# Altium PCB cricket-node-hw__B.PcbDoc (part 1 of 3)
Units mil, origin at the board's own origin, x right, y up, seen from the top; angles counter-clockwise.
Board outline 2830 x 2830 mil, 4 copper layers (Top Layer, GND1, PWR/SIG, Bottom Layer), stack 61.7 mil thick; 153 components, 116 nets, 542 pads, 320 vias.
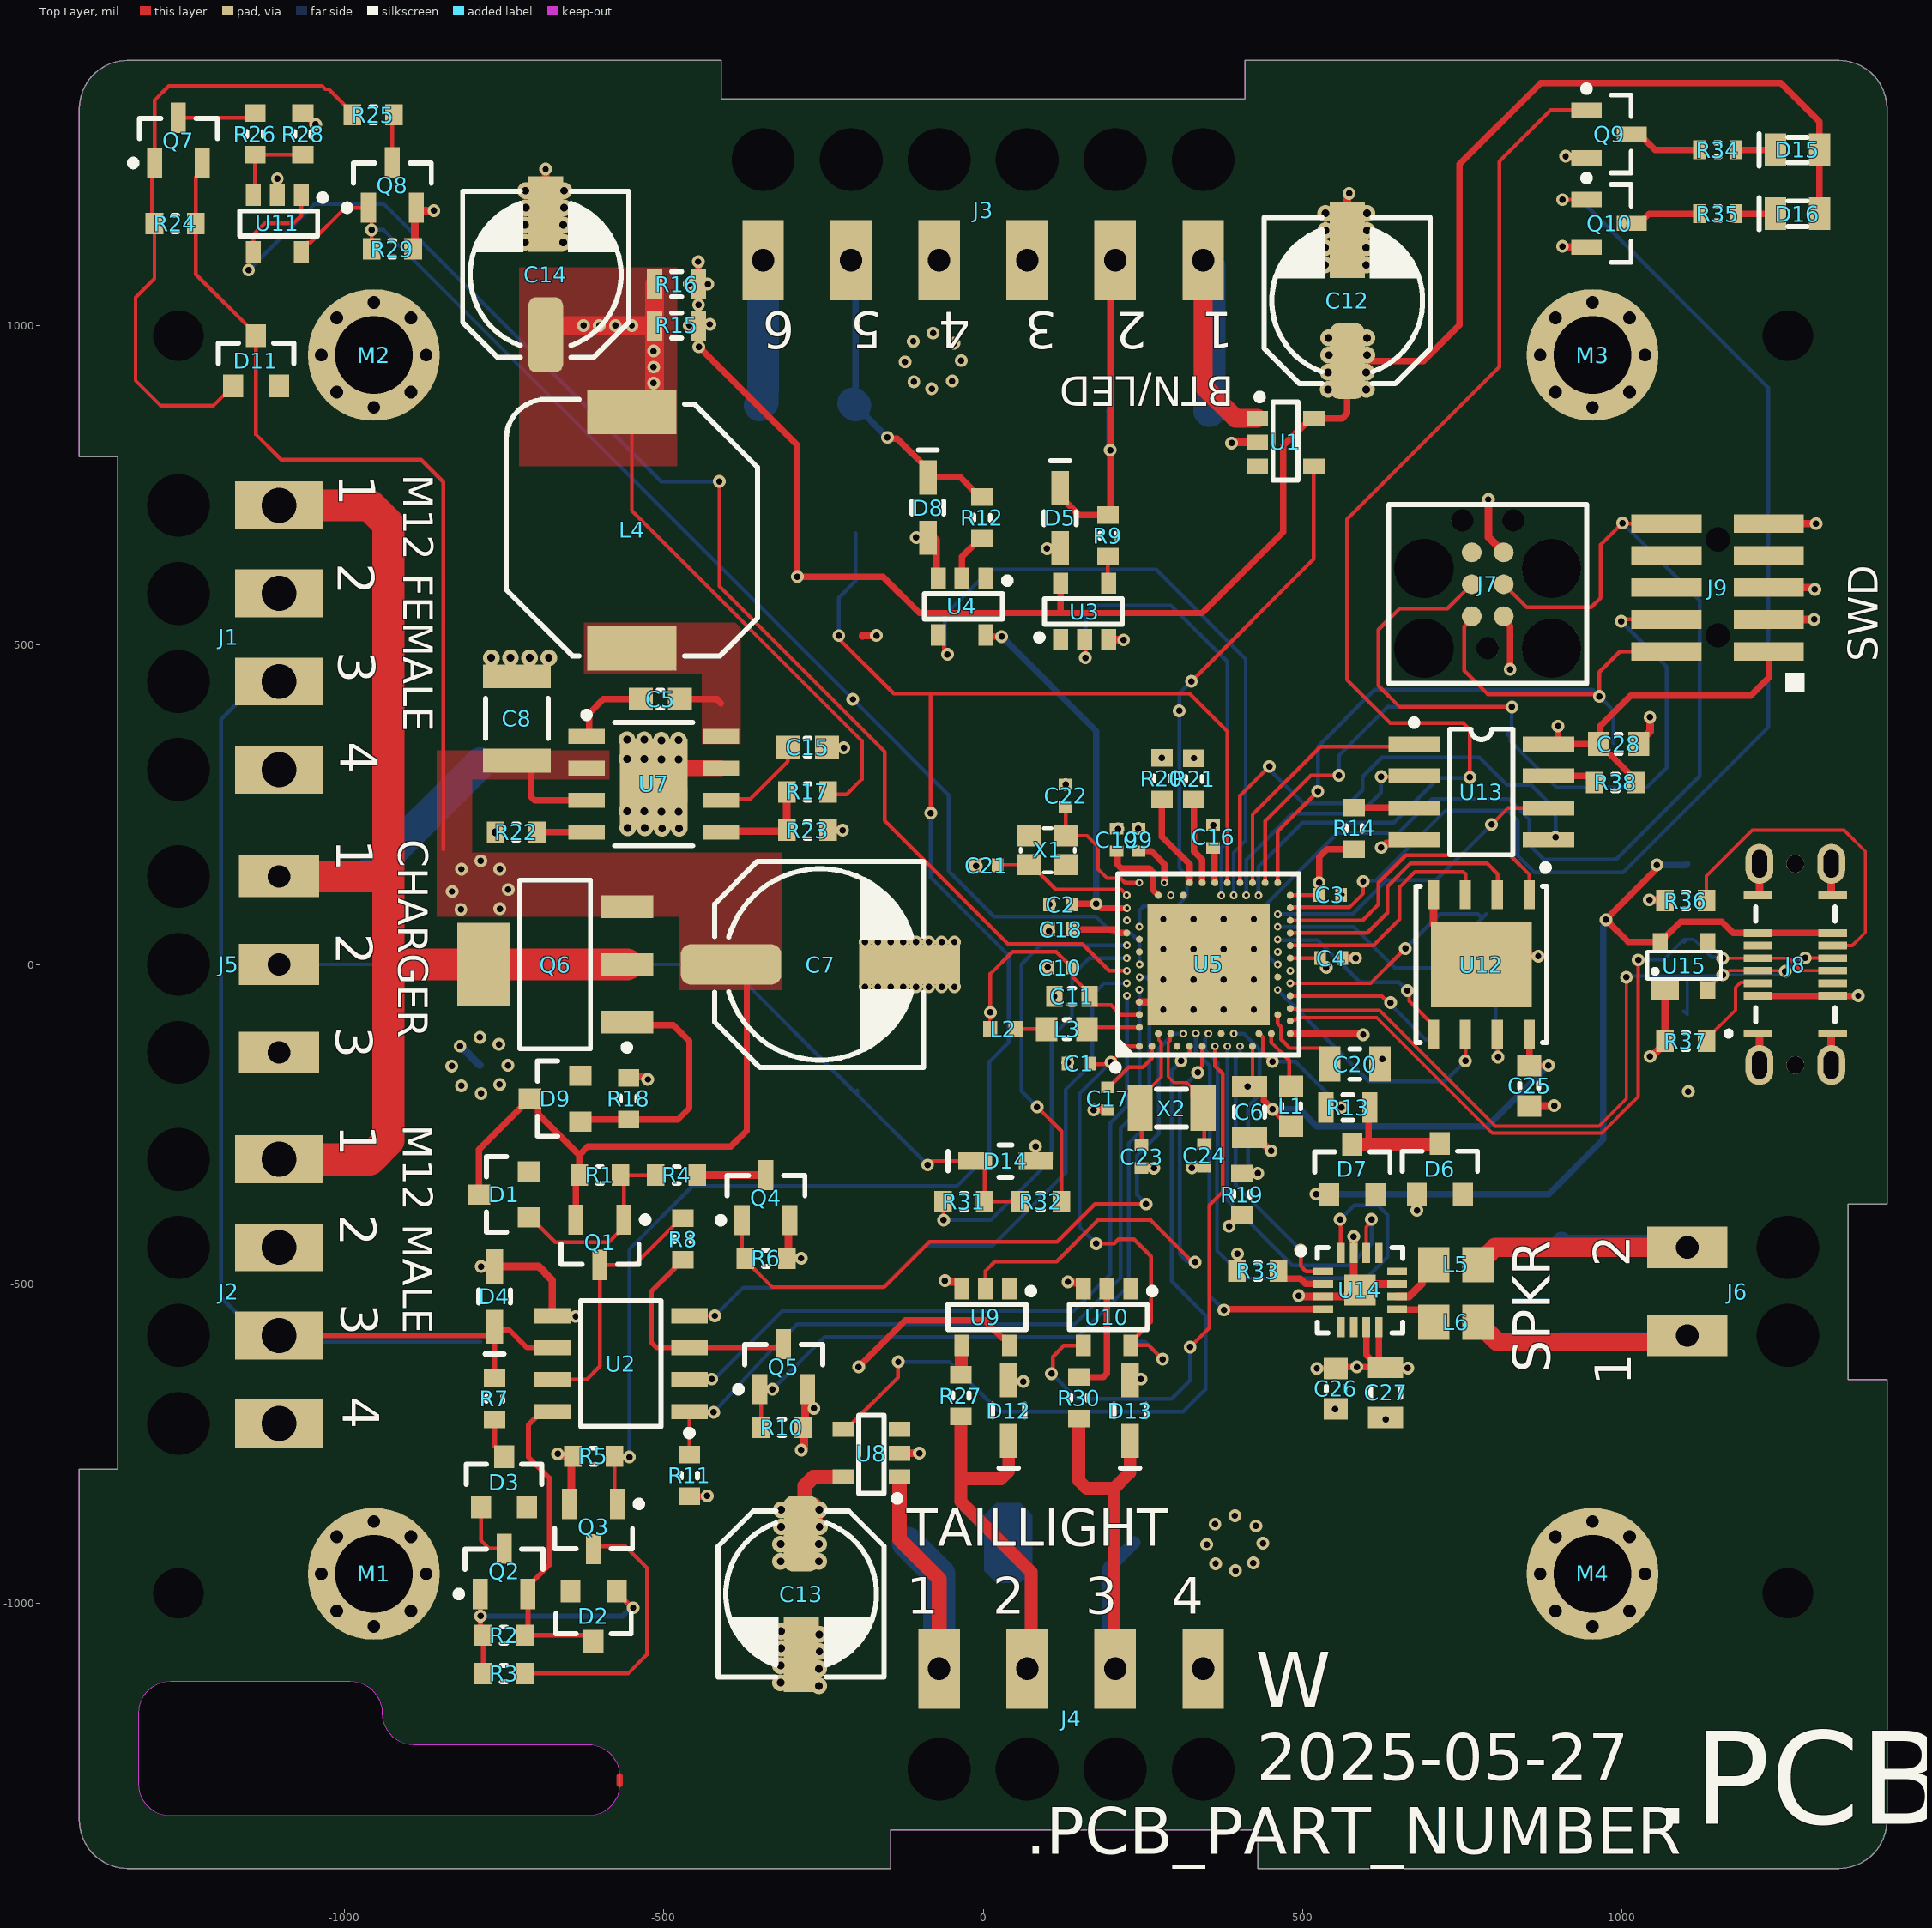
[diagram p0: Top Layer view]
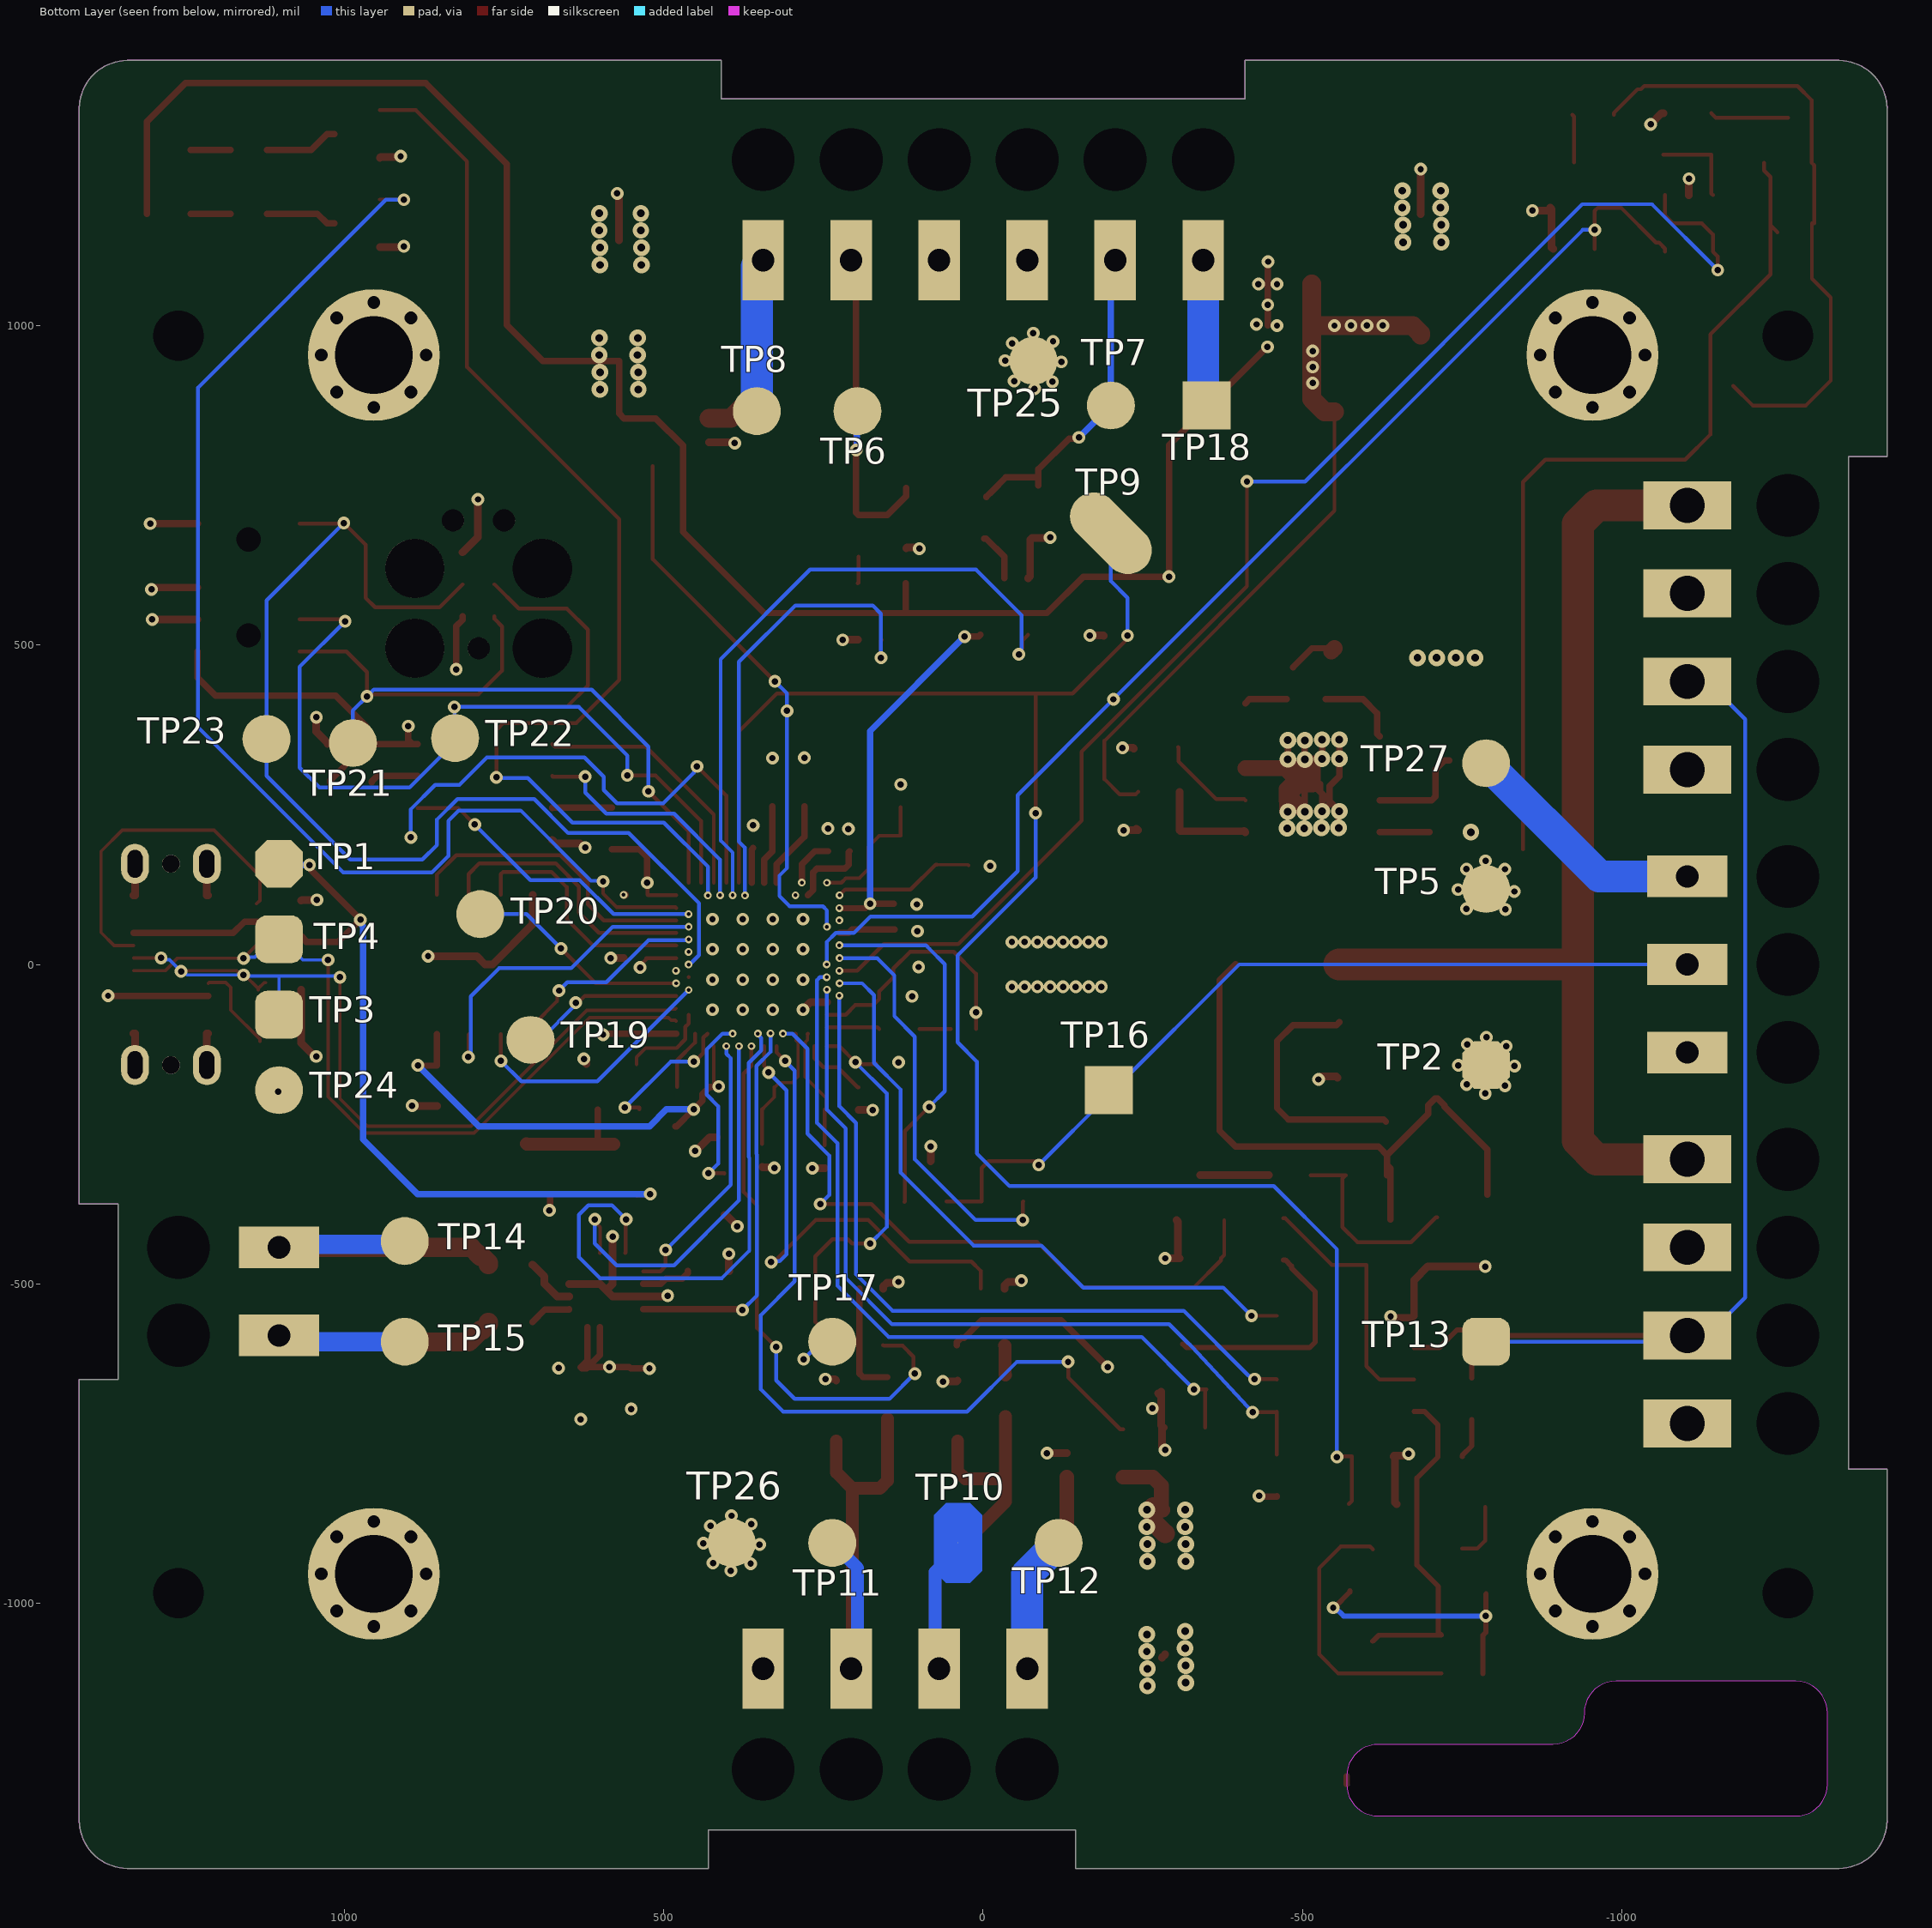
[diagram p1: Bottom Layer view, seen from below]
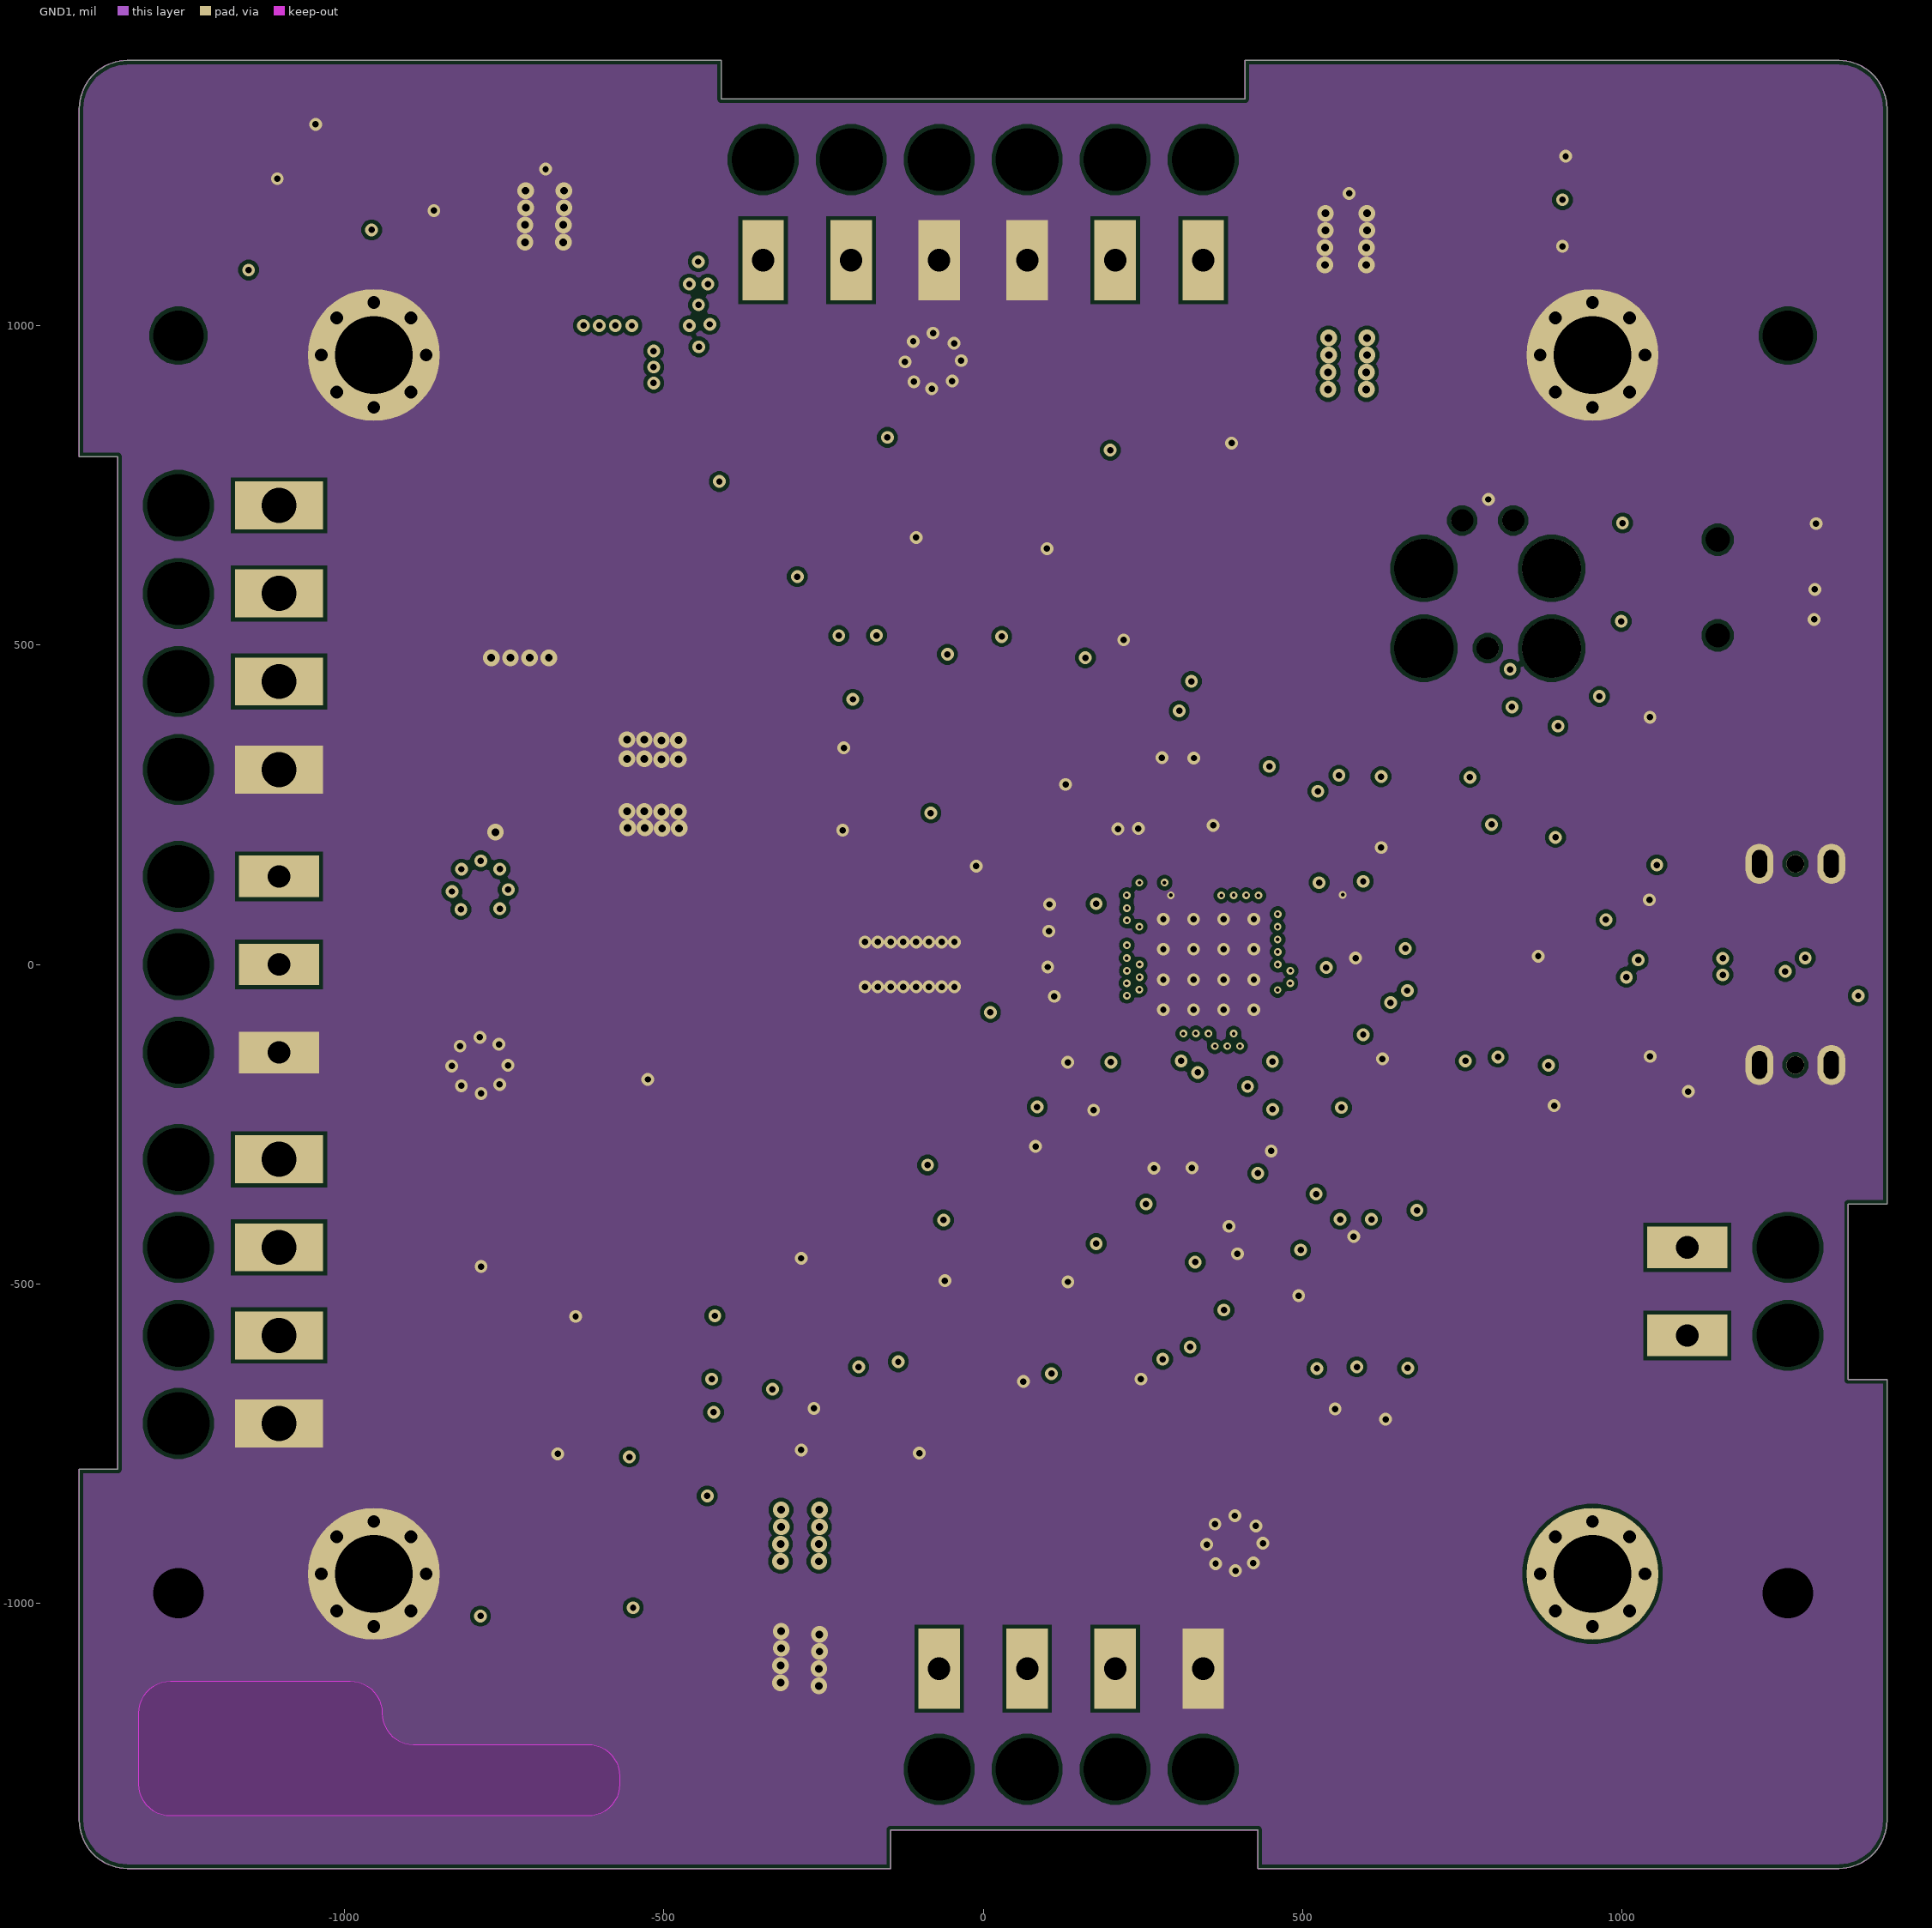
[diagram p2: GND1]
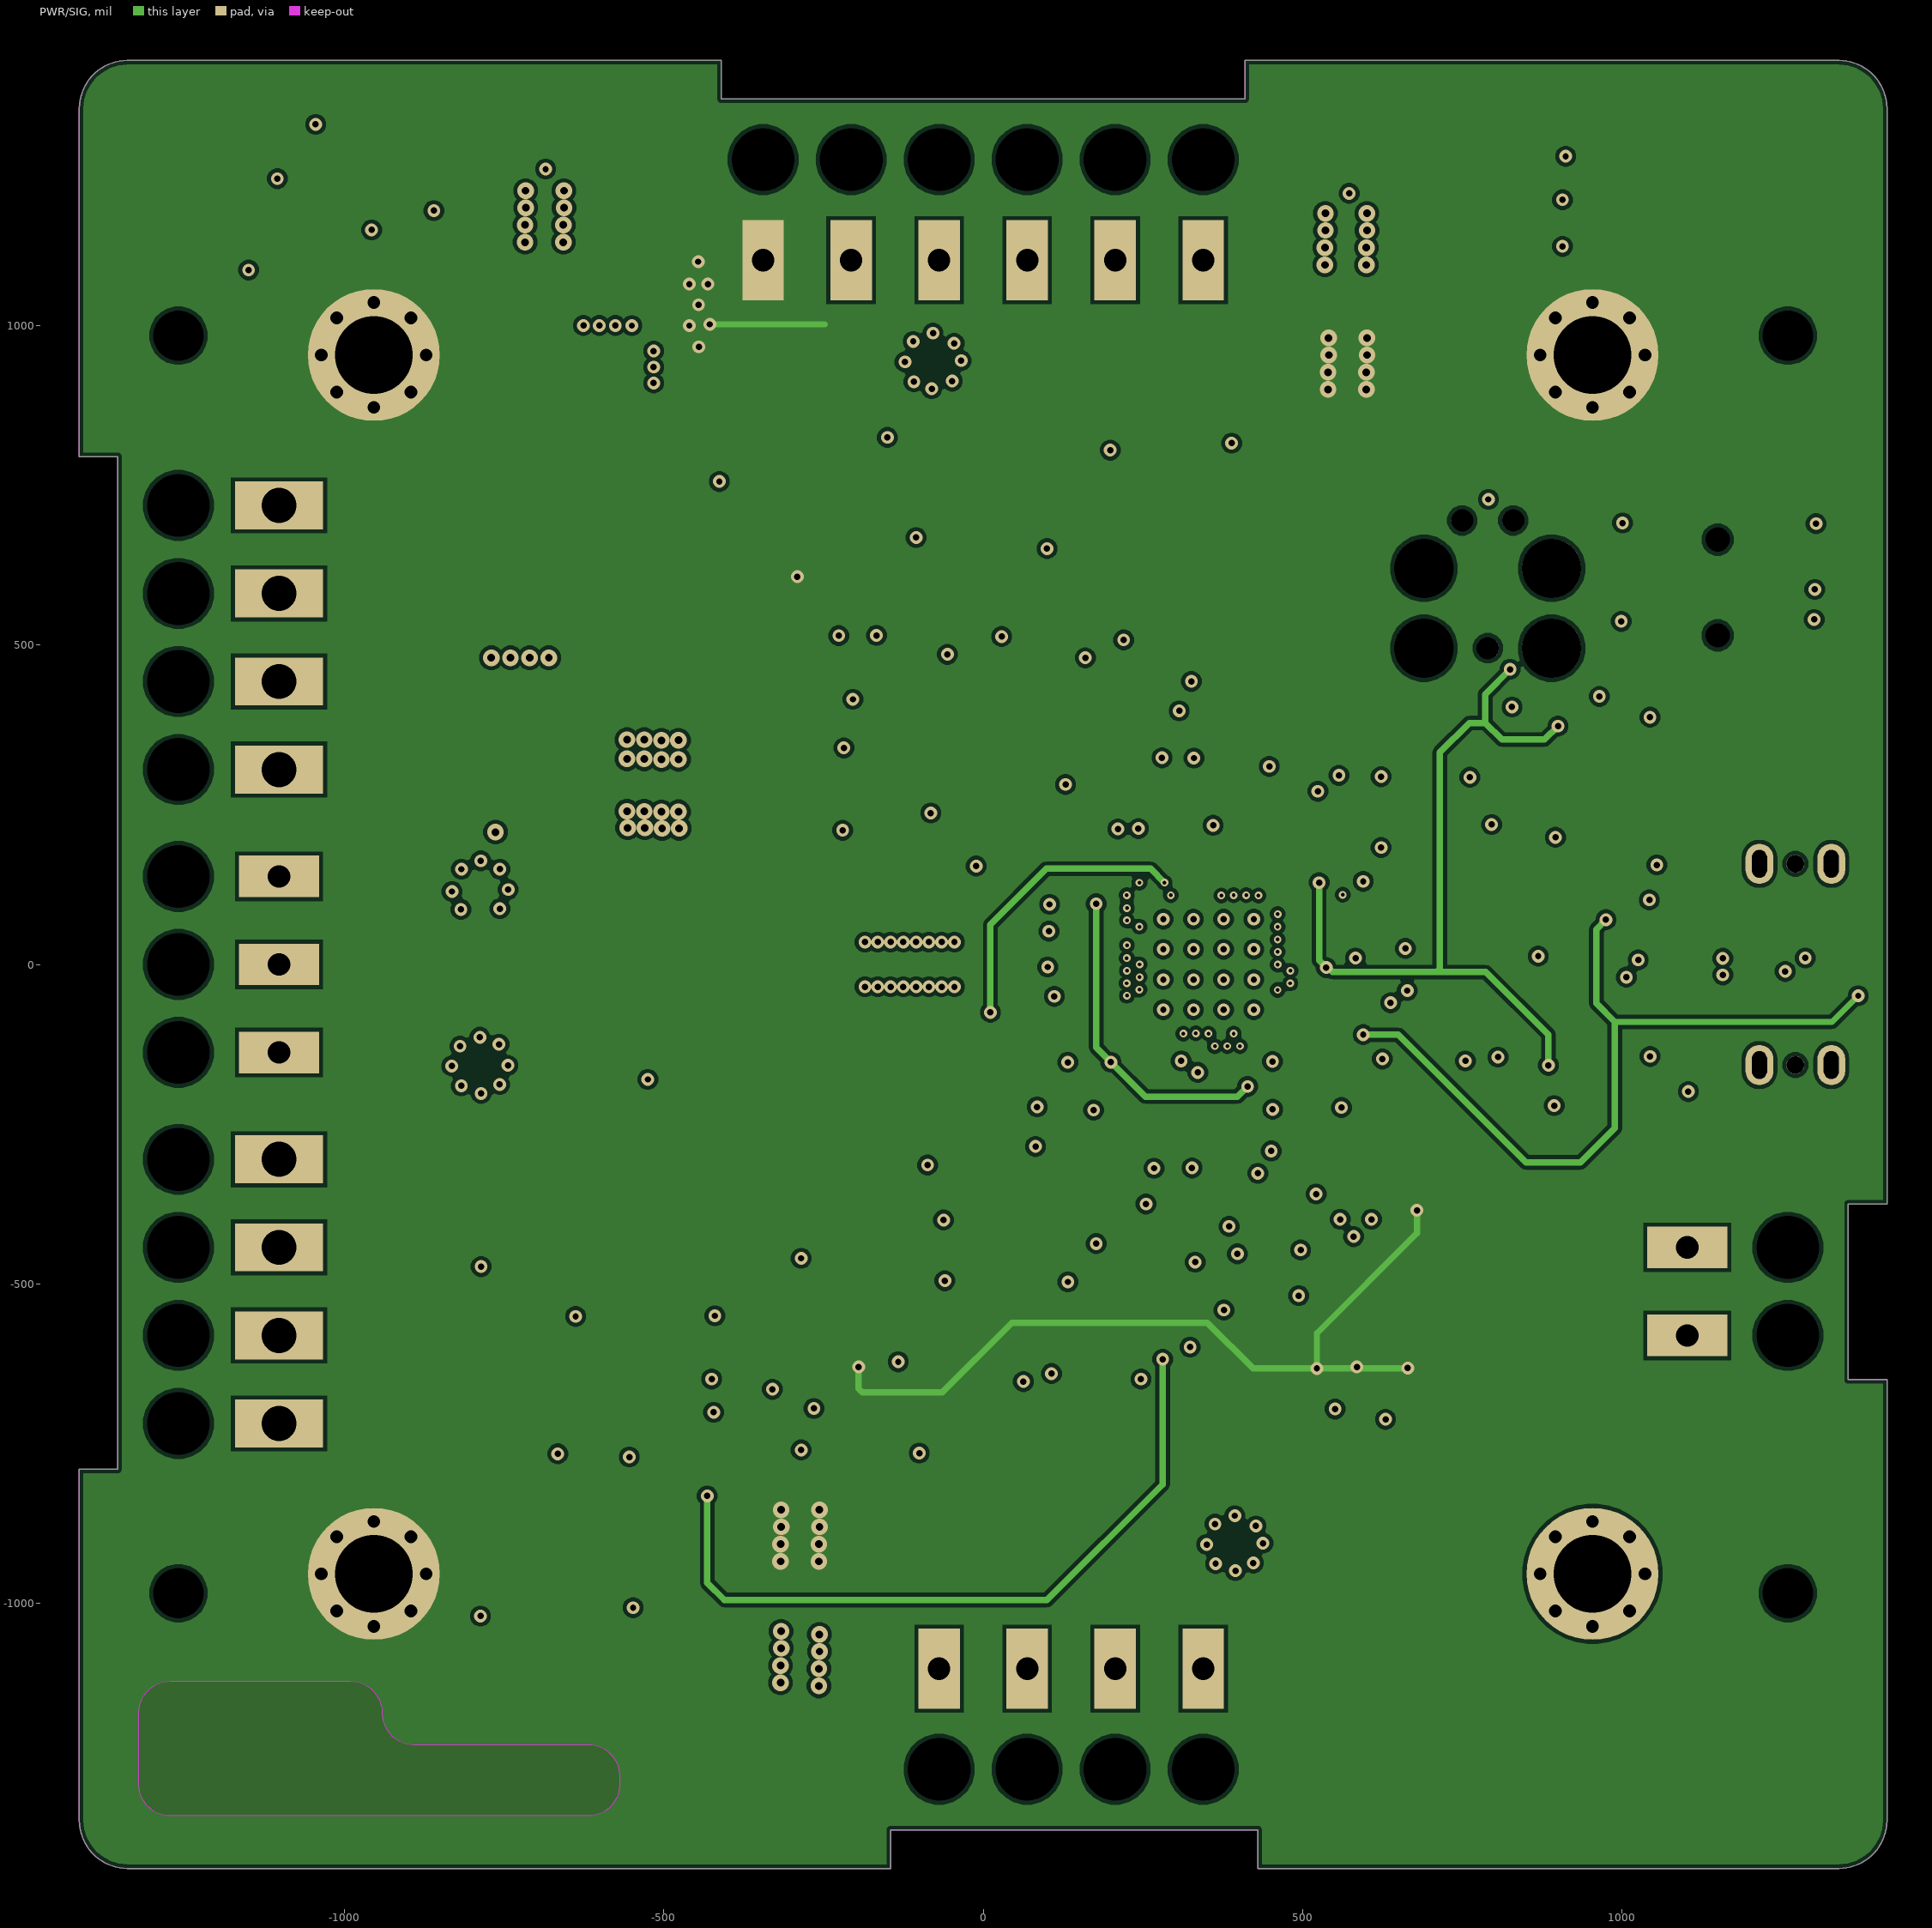
[diagram p3: PWR/SIG]
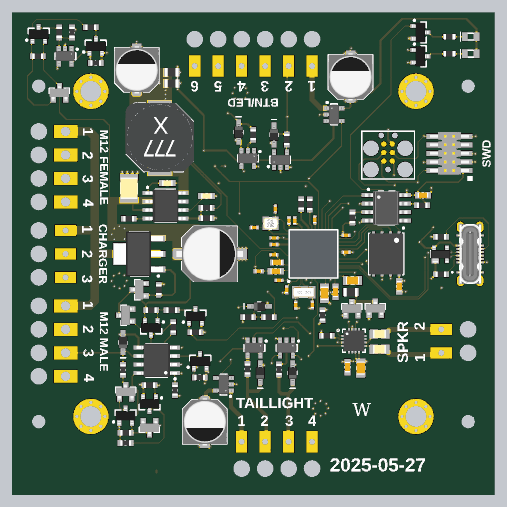
[diagram p5: 3D render of the assembled board from above, using the file's embedded part models]

## Layer stack, top to bottom
Top Solder: solder mask 0.4, Solder Resist, Dk 3.5
Top Layer: signal copper 1.4
Dielectric 1: prepreg 2.8, PP-006, Dk 4.1
GND1: signal copper 1.378
Dielectric1: dielectric 50.544, FR-4, Dk 4.8
PWR/SIG: signal copper 1.378
Dielectric 2: prepreg 2.8, PP-006, Dk 4.1
Bottom Layer: signal copper 1.4
Bottom Solder: solder mask 0.4, Solder Resist, Dk 3.5

## Board outline
-1415,-1340 ccw(c-1340,-1340) -1340,-1415 -145,-1415 -145,-1355 430,-1355 430,-1415 1340,-1415 ccw(c1340,-1340) 1415,-1340 1415,-650 1354.49,-650 1354.49,-374.97 1415,-374.97 1415,1340 ccw(c1340,1340) 1340,1415 410,1415 410,1355 -410,1355 -410,1415 -1340,1415 ccw(c-1340,1340) -1415,1340 -1415,795 -1355,795 -1355,-790 -1415,-790
cut-out: -1322,-1283 -1322,-1172 cw(c-1272,-1172) -1272,-1122 -991,-1122 cw(c-991,-1172) -941,-1172 ccw(c-892,-1172) -892,-1221 -619,-1221 cw(c-619,-1271) -569,-1271 -569,-1283 cw(c-619,-1283) -619,-1333 -1272,-1333 cw(c-1272,-1283)

## Design rules (kind name [scope] priority, off if disabled: settings)
Clearance [All] p1: gap=6 ignorepadtopadclearanceinfootprint=FALSE
ComponentClearance [All] p1: gap=0 collisioncheckmode=3 verticalgap=10 showdistances=FALSE
DiffPairsRouting USB [All] p1: maxlimit=6 minlimit=6 mostfreqgap=6 toplayer_minwidth=5.14 toplayer_maxwidth=5.14 toplayer_prefwidth=5.14 midlayer1_minwidth=5.14 midlayer1_maxwidth=5.14 midlayer1_prefwidth=5.14 midlayer2_minwidth=5.14 midlayer2_maxwidth=5.14 midlayer2_prefwidth=5.14 bottomlayer_minwidth=5.14 bottomlayer_maxwidth=5.14 bottomlayer_prefwidth=5.14 maxuncoupledlength=750
Height [All] p1: minheight=0 maxheight=3000 prefheight=500
HoleSize [All] p1: absolutevalues=TRUE maxlimit=250 minlimit=1 maxpercent=80.000 minpercent=20.000
PolygonConnect [All] p1: connectstyle=Direct reliefconductorwidth=10 reliefentries=4 polygonreliefangle="90 Angle" airgapwidth=10
RoutingVias [All] p1: holewidth=12 width=26 viastyle="Through Hole" minholewidth=6 minwidth=12 maxholewidth=50 maxwidth=75
SilkToSolderMaskClearance SilkscreenOverComponentPads [IsPad] p1: minsilkscreentomaskgap=10 clearancetoexposedcopper=TRUE
SolderMaskExpansion [All] p1: expansion=4 istentingtop=FALSE
SupplyNets "Schematic Supply Nets" [InNet('+VIN-PROTECT')] p1: voltage=0.000
SupplyNets "Schematic Supply Nets_1" [InNet('+5v0')] p2: voltage=0.000
SupplyNets "Schematic Supply Nets_2" [InNet('VDD')] p3: voltage=0.000
SupplyNets "Schematic Supply Nets_8" [InNet('+VIN')] p4: voltage=0.000
SupplyNets "Schematic Supply Nets_7" [InNet('GND')] p5: voltage=0.000
SupplyNets "Schematic Supply Nets_3" [InNet('+VBUS')] p6: voltage=0.000
Width [All] p1: maxlimit=200 minlimit=5 preferedwidth=6
25 further rules are at their usual default settings.

## Classes and differential pairs
differential pair USB-DEVICE-D: +USB-DEVICE-D_P -USB-DEVICE-D_N

## Components (designator, comment, footprint, x,y, rotation, side; value= is the part's Value field where it differs from the comment)
C1 "0.1µF" C0402_0.55MM_HD 150,-155 r0 top
C2 "0.1µF" C0402_0.55MM_HD 121,94 r0 top
C3 "0.1µF" C0402_0.55MM_HD 543,109 r180 top
C4 "0.1µF" C0402_0.55MM_HD 545,10 r180 top
C5 "0.1µF" C0603_0.90MM_MD#1 -505.53,415.13 r180 top
C6 "4.7µF" C0805_1.40MM_MD 417,-231 r90 top
C7 "100µF" C_ALU_F -255,0 r0 top locked
C8 "10µF" C1210_2.80MM_MD -730,385 r90 top
C9 "47nF" C0402_0.55MM_HD 243,195 r270 top value=0.047µF
C10 "47nF" C0402_0.55MM_HD 120,-5 r0 top value=0.047µF
C11 "1µF" C0603_0.90MM_HD 139,-50 r0 top
C12 "150µF" C_ALU_D 570,1039 r90 top
C13 "150µF" C_ALU_D -285,-985.51 r270 top
C14 "150µF" C_ALU_D -685,1080 r90 top
C15 "10000pF" C0603_0.90MM_MD#1 -275,340 r180 top
C16 "1000pF" C0402_0.55MM_HD 360,200 r270 top
C17 "0.1µF" C0402_0.55MM_HD 195,-210 r90 top
C18 "0.1µF" C0402_0.55MM_HD 121,55 r0 top
C19 "100pF" C0402_0.55MM_HD 209,195 r270 top
C20 "4.7µF" C0805_1.40MM_MD 582,-156 r180 top
C21 "8pF" C0402_0.55MM_HD 5,155 r180 top
C22 "8pF" C0402_0.55MM_HD 129,264 r90 top
C23 "8pF" C0402_0.55MM_HD 248,-301 r90 top
C24 "8pF" C0402_0.55MM_HD 346,-299 r90 top
C25 "0.1µF" C0603_0.90MM_MD#2 855,-190 r90 top
C26 "0.1µF" C0603_0.90MM_MD#2 552,-664 r90 top
C27 "10µF" C0805_1.40MM_MD 630,-670 r90 top
C28 "0.1µF" C0603_0.90MM_MD#2 995,345 r180 top
D1 "BZX84C12-7-F" D_SOT-23-3_P -750,-360 r180 top
D2 "BZX84B16-7-F" D_SOT-23-3_P -610,-1020 r270 top
D3 "BAS16-7-F" D_SOT-23-3_P -750,-810 r90 top
D4 "PESD1IVN24-AX" D_SOD-323_P -765,-520 r270 top
D5 "PESD5V0S1BA-115" D_SOD-323_P 120.53,698.65 r90 top
D6 "BAS16-7-F" D_SOT-23-3_P 715,-320 r90 top
D7 "BAS16-7-F" D_SOT-23-3_P 578,-321 r90 top
D8 "PESD5V0S1BA-115" D_SOD-323_P -86.57,715.03 r90 top
D9 "BZX84B16-7-F" D_SOT-23-3_P -670,-210 r180 top
D11 "BZX84B16-7-F" D_SOT-23-3_P -1138.39,944.88 r90 top
D12 "PESD5V0S1BA-115" D_SOD-323_P 40,-698.5 r270 top
D13 "PESD5V0S1BA-115" D_SOD-323_P 230,-698.5 r270 top
D14 "PESD5V0S1BA-115" D_SOD-323_P 35,-308 r180 top
D15 "APT2012SURCK" LED-0805-RED 1275,1275 r180 top
D16 "APT2012CGCK" LED-0805-GREEN 1275,1175 r180 top
J1 "WIREPAD-18AWG-4X-3.5MM" WIREPAD-18AWG-4X-3.5MM -1181.1,511.81 r0 top
J2 "WIREPAD-18AWG-4X-3.5MM" WIREPAD-18AWG-4X-3.5MM -1181.1,-511.81 r0 top
J3 "WIREPAD-22AWG-6X-3.5MM" WIREPAD-22AWG-6X-3.5MM 0,1181.1 r270 top
J4 "WIREPAD-22AWG-4X-3.5MM" WIREPAD-22AWG-4X-3.5MM 137.8,-1181.1 r90 top
J5 "WIREPAD-22AWG-3X-3.5MM" WIREPAD-22AWG-3X-3.5MM -1181.1,0 r0 top
J6 "WIREPAD-22AWG-2X-3.5MM" WIREPAD-22AWG-2X-3.5MM 1181.1,-511.81 r180 top
J7 "TAG-CONNECT-SWD" TC2030 950,435 r90 top
J8 "USB4145-03-0230-C" USB4145-03-0230-C 1271.65,0 r90 top locked
J9 "20021121-00010T4LF" FTSH-105-05-F-DV 1150,590 r90 top
L1 "10uH" C0603_0.90MM_MD#2 482,-222 r90 top
L2 "15nH" C0402_0.55MM_MD 31.02,-101.18 r0 top
L3 "10uH" C0603_0.90MM_MD#2 131.02,-101.18 r0 top
L4 "6.8 uH 3.84A" L_MSS1038 -550,680 r90 top
L5 "MPZ2012S221AT000" L0805_1.45MM_MD 740,-470 r0 top
L6 "MPZ2012S221AT000" L0805_1.45MM_MD 740,-560 r0 top
M1 "M2.5" M2.5 -954,-954 r0 top locked
M2 "M2.5" M2.5 -954,954 r0 top locked
M3 "M2.5" M2.5 954,954 r0 top locked
M4 "M2.5" M2.5 954,-954 r0 top locked
Q1 "BSS84-7-F" SOT-23 -600,-435 r270 top
Q2 "BSS84-7-F" SOT-23 -750,-950 r90 top
Q3 "2N7002P,215" SOT-23 -610,-880 r270 top
Q4 "2N7002P,215" SOT-23 -340,-365 r90 top
Q5 "BSS138K" SOT-23 -312.4,-629.57 r90 top
Q6 "ZXMP4A16GTA" SOT223 -670,0 r180 top
Q7 "BSS84-7-F" SOT-23 -1260,1290 r90 top
Q8 "2N7002P,215" SOT-23 -925,1220 r90 top
Q9 "2N7002P,215" SOT-23 980,1300 r0 top
Q10 "2N7002P,215" SOT-23 980,1160 r0 top
R1 "100kΩ" R0603_0.55MM_MD -600,-330 r180 top
R2 "100kΩ" R0603_0.55MM_MD -750,-1050 r0 top
R3 "10kΩ" R0603_0.55MM_MD -750,-1110 r0 top
R4 "10kΩ" R0603_0.55MM_MD -480,-330 r0 top
R5 "1MΩ" R0603_0.55MM_MD -610,-770 r0 top
R6 "1MΩ" R0603_0.55MM_MD -340,-460 r180 top
R7 "1kΩ" R0603_0.55MM_MD -765,-680 r90 top
R8 "100kΩ" R0603_0.55MM_MD -470,-430 r270 top
R9 "100Ω" R0603_0.55MM_MD 195.33,671.09 r90 top
R10 "1MΩ" R0603_0.55MM_MD -315,-725 r180 top
R11 "10kΩ" R0603_0.55MM_MD -460,-800 r90 top
R12 "100Ω" R0603_0.55MM_MD -1.77,699.28 r90 top
R13 "0Ω" R0805_0.70MM_HD 571,-224 r0 top
R14 "100kΩ" R0603_0.55MM_MD 581,213 r270 top
R15 "0Ω" R0805_0.70MM_HD -480,1000 r0 top
R16 "0Ω" R0805_0.70MM_HD -480,1065 r0 top
R17 "523kΩ" R0603_0.55MM_MD -275,270 r0 top
R18 "10kΩ" R0603_0.55MM_MD -555,-210 r90 top
R19 "100kΩ" R0603_0.55MM_MD 405,-360 r90 top
R20 "100kΩ" R0603_0.55MM_MD 280,291 r270 top
R21 "100kΩ" R0603_0.55MM_MD 330,290.48 r270 top
R22 "49.9kΩ" R0603_0.55MM_MD -731.04,207.13 r180 top
R23 "100k" R0603_0.55MM_MD -275,210 r0 top value=100kΩ
R24 "100kΩ" R0603_0.55MM_MD -1265,1160 r0 top
R25 "10kΩ" R0603_0.55MM_MD -955,1330 r0 top
R26 "100kΩ" R0603_0.55MM_MD -1140,1300 r90 top
R27 "100Ω" R0603_0.55MM_MD -35,-675 r270 top
R28 "10kΩ" R0603_0.55MM_MD -1065,1300 r90 top
R29 "1MΩ" R0603_0.55MM_MD -925,1120 r180 top
R30 "100Ω" R0603_0.55MM_MD 150,-678.5 r270 top
R31 "100kΩ" R0603_0.55MM_MD -30,-371 r180 top
R32 "100Ω" R0603_0.55MM_MD 90,-371 r180 top
R33 "100kΩ" R0603_0.55MM_MD 430,-480 r180 top
R34 "330Ω" R0603_0.55MM_HD 1150,1275 r0 top
R35 "330Ω" R0603_0.55MM_HD 1150,1175 r0 top
R36 "5.1kΩ" R0603_0.55MM_MD 1100,100 r0 top
R37 "5.1kΩ" R0603_0.55MM_MD 1100,-120 r0 top
R38 "100kΩ" R0603_0.55MM_MD 990,285 r0 top
TP1 "SMT Testpoint 1MM" SMT_TP-1MM-OCTAGON 1102.36,157.48 r180 bottom
TP2 "SMT Testpoint 1MM" SMT_TP-1MM-OCTAGON -787.4,-157.48 r180 bottom
TP3 "SMT Testpoint 1MM" SMT_TP-1MM-ROUNDED-RECT 1102.36,-78.74 r180 bottom
TP4 "SMT Testpoint 1MM" SMT_TP-1MM-ROUNDED-RECT 1102.36,39.37 r180 bottom
TP5 "SMT Testpoint 1MM" SMT_TP-1MM -787.4,118.11 r180 bottom
TP6 "SMT Testpoint 1MM" SMT_TP-1MM 196.85,866.14 r180 bottom
TP7 "SMT Testpoint 1MM" SMT_TP-1MM -200,875 r180 bottom
TP8 "SMT Testpoint 1MM" SMT_TP-1MM 354.33,866.14 r180 bottom
TP9 "SMT Testpoint 1MM" SMT_TP_OBROUND -200,675 r180 bottom
TP10 "SMT Testpoint 1MM" SMT_TP-CHAMFERED-RECT 39.37,-905.51 r180 bottom
TP11 "SMT Testpoint 1MM" SMT_TP-1MM 236.22,-905.51 r180 bottom
TP12 "SMT Testpoint 1MM" SMT_TP-1MM -118.11,-905.51 r180 bottom
TP13 "SMT Testpoint 1MM" SMT_TP-1MM-ROUNDED-RECT -787.4,-590.55 r180 bottom
TP14 "SMT Testpoint 1MM" SMT_TP-1MM 905.51,-433.07 r180 bottom
TP15 "SMT Testpoint 1MM" SMT_TP-1MM 905.51,-590.55 r180 bottom
TP16 "SMT Testpoint 1MM" SMT_TP-1MM-RECT -196.85,-196.85 r180 bottom
TP17 "SMT Testpoint 1MM" SMT_TP-1MM 236.22,-590.55 r180 bottom
TP18 "SMT Testpoint 1MM" SMT_TP-1MM-RECT -350,875 r180 bottom
TP19 "SMT Testpoint 1MM" SMT_TP-1MM 708.66,-118.11 r180 bottom
TP20 "SMT Testpoint 1MM" SMT_TP-1MM 787.4,78.74 r180 bottom
TP21 "SMT Testpoint 1MM" SMT_TP-1MM 986.75,346.5 r180 bottom
TP22 "SMT Testpoint 1MM" SMT_TP-1MM 826.77,354.33 r180 bottom
TP23 "SMT Testpoint 1MM" SMT_TP-1MM 1122,353 r180 bottom
TP24 "SMT Testpoint 1MM" SMT_TP-1MM 1102.36,-196.85 r180 bottom
TP25 "SMT Testpoint 1MM" SMT_TP-1MM -78.74,944.88 r180 bottom
TP26 "SMT Testpoint 1MM" SMT_TP-1MM 393.7,-905.51 r180 bottom
TP27 "SMT Testpoint 1MM" SMT_TP-1MM -787.4,314.96 r180 bottom
U1 "AP22804AW5-7" SOT23-5 473.29,817.4 r0 top
U2 "TJA1021T/20/CM,118" SOIC127P600X175-8N -567.28,-625 r180 top
U3 "SN74LV1T34DBVR" SOT23-5 158.87,552.43 r90 top
U4 "SN74LV1T34DBVR" SOT23-5 -33.01,560.31 r270 top
U5 "NRF52840-QIAA-R" AQFN50P700X700X85_HS-74N 352.83,0 r90 top locked
U7 "AP64352SP-13" SO8-EP -515.72,282.13 r0 top locked
U8 "AP22804AW5-7" SOT23-5 -175,-765 r180 top
U9 "SN74LV1T34DBVR" SOT23-5 3.94,-551.81 r270 top
U10 "SN74LV1T34DBVR" SOT23-5 193.94,-551.81 r270 top
U11 "TLV271CW5-7" sot23-5 -1105,1160 r270 top
U12 "MX25R6435FZNIL0" SON127P600X80_HS-9N 780,0 r270 top
U13 "FM25L16B-GTR" "SOIC 8" 780,270 r270 top
U14 "MAX98357AETE+T" QFN50P300X300X80_HS-17N-2 590,-510 r0 top
U15 "PRTR5V0U2X,215" SOT143B 1067.87,-39.8 r0 top
X1 "32MHz" XTAL_2016 101.02,178.82 r180 top
X2 "32KHz" XTAL_3215 295,-225 r180 top

## Footprints (in the part's own frame and the unit in brackets; to place one, negate y for a bottom-side part, rotate by r counter-clockwise, add the part's x,y. Pads: shape width x height; smd on the part's side, far side on the other; paste and mask are expansions set on the pad)
AQFN50P700X700X85_HS-74N [mm] "AQFN, 73-Leads, Body 7.00x7.00mm, Pitch 0.50mm, Thermal Pad 4.95x4.95mm, IPC Medium Density"
  rect 4.85x4.85 smd mask+0.05: 74(0,0)
  round 0.275 smd paste+0.012 mask+0.05: A8(-1.25,3.25) A10(-0.75,3.25) A12(-0.25,3.25) A14(0.25,3.25) A16(0.75,3.25) A18(1.25,3.25) A20(1.75,3.25) A22(2.25,3.25) A23(2.75,3.25) AA24(3.25,-2.25) AB2(-2.75,-2.5) AC5(-2,-2.75) AC9(-1,-2.75) AC11(-0.5,-2.75) AC13(0,-2.75) AC15(0.5,-2.75) AC17(1,-2.75) AC19(1.5,-2.75) AC21(2,-2.75) AC24(3.25,-2.75) AD2(-2.75,-3.25) AD4(-2.25,-3.25) AD6(-1.75,-3.25) AD8(-1.25,-3.25) AD10(-0.75,-3.25) AD12(-0.25,-3.25) AD14(0.25,-3.25) AD16(0.75,-3.25) AD18(1.25,-3.25) AD20(1.75,-3.25) AD22(2.25,-3.25) AD23(2.75,-3.25) B1(-3.25,2.75) B3(-2.5,2.75) B5(-2,2.75) B7(-1.5,2.75) B9(-1,2.75) B11(-0.5,2.75) B13(0,2.75) B15(0.5,2.75) B17(1,2.75) B19(1.5,2.75) B24(3.25,2.75) C1(-3.25,2.25) D2(-2.75,2) D23(2.75,2) E24(3.25,1.75) F2(-2.75,1.5) F23(2.75,1.5) G1(-3.25,1.25) H2(-2.75,1) H23(2.75,1) J1(-3.25,0.75) J24(3.25,0.75) K2(-2.75,0.5) L1(-3.25,0.25) L24(3.25,0.25) M2(-2.75,0) N1(-3.25,-0.25) N24(3.25,-0.25) P2(-2.75,-0.5) P23(2.75,-0.5) R1(-3.25,-0.75) R24(3.25,-0.75) T2(-2.75,-1) T23(2.75,-1) U1(-3.25,-1.25) U24(3.25,-1.25) V23(2.75,-1.5) W1(-3.25,-1.75) W24(3.25,-1.75) Y2(-2.75,-2) Y23(2.75,-2)
  silkscreen extent -4.22,-3.6 3.6,3.82, body extent -3.5,-3.5 3.5,3.5, height 0.87
C0402_0.55MM_HD [mm] "Chip Capacitor, 2-Leads, Body 1.00x0.50mm, IPC High Density"
  rect 0.46x0.54 smd: 1(-0.45,0) 2(0.45,0)
  body extent -0.5,-0.25 0.5,0.25, height 0.55
C0402_0.55MM_MD [mm] "Chip Capacitor, 2-Leads, Body 1.00x0.50mm, IPC Medium Density"
  rect 0.56x0.64 smd: 1(-0.5,0) 2(0.5,0)
  body extent -0.5,-0.25 0.5,0.25, height 0.55
C0603_0.90MM_HD [mm] "Chip Capacitor, 2-Leads, Body 1.60x0.80mm, IPC High Density"
  rect 0.65x0.85 smd: 1(-0.7,0) 2(0.7,0)
  silkscreen extent -0.1,-0.33 0.1,0.33, body extent -0.8,-0.4 0.8,0.4, height 0.9
C0603_0.90MM_MD#1 [mm] "Capacitor 0603 - Medium Density"
  rect 0.95x0.9 smd: 1(-0.775,0) 2(0.775,0)
  silkscreen extent -0.1,-0.35 0.1,0.35, body extent -0.8,-0.4 0.8,0.4, height 0.9
C0603_0.90MM_MD#2 [mm] "Chip Capacitor, 2-Leads, Body 1.60x0.80mm, IPC Medium Density"
  rect 0.85x0.95 smd: 1(-0.8,0) 2(0.8,0)
  silkscreen extent -0.1,-0.38 0.1,0.38, body extent -0.8,-0.4 0.8,0.4, height 0.9
C0805_1.40MM_MD [mm] "Chip Capacitor, 2-Leads, Body 2.00x1.25mm, IPC Medium Density"
  rect 0.85x1.4 smd: 1(-1,0) 2(1,0)
  silkscreen extent -0.2,-0.6 0.2,0.6, body extent -1,-0.63 1,0.63, height 1.4
C1210_2.80MM_MD [mm] "Capacitor - 1210 - Medium Density"
  rect 0.95x2.7 smd: 1(-1.675,0) 2(1.675,0)
  silkscreen extent -0.8,-1.25 0.8,1.25, body extent -1.6,-1.25 1.6,1.25, height 2.8
C_ALU_D [mm] "6.3mm x 5.8mm"
  rrect50% 3x1.4 smd: 1(-2.4,0)
  rect 3x1.4 smd: 2(2.4,0)
  silkscreen extent -3.3,-3.3 3.3,3.3, body extent -3.5,-3.3 3.5,3.3, height 5.41
C_ALU_F [mm] "8.0mm x 10.2mm"
  rrect50% 4x1.6 smd: 1(-3.55,0)
  rect 4x1.6 smd: 2(3.55,0)
  silkscreen extent -4.2,-4.1 4.1,4.1, body extent -5,-4.15 4.9,4.15, height 10.22
D_SOD-323_P [mm] "SOD-123 Diode - Polarized"
  rect 1.35x0.7 smd: 1(-1.2,0) 2(1.2,0)
  silkscreen extent -0.25,-0.64 2.29,0.64, body extent -1.3,-0.68 1.3,0.67, height 1.1
D_SOT-23-3_P [mm] "Diode - SOT-23-3 - Polarized"
  rect 0.9x0.8 smd: 1(-1,0.915) 2(-1,-0.915) 3(1,0)
  silkscreen extent -0.1,-1.5 0.7,1.5, body extent -1.2,-1.45 1.22,1.45, height 0.98
FTSH-105-05-F-DV [mil]
  rect 29x110 smd: 1(-100,-80) 2(-100,80) 3(-50,-80) 4(-50,80) 5(0,-80) 6(0,80) 7(50,-80) 8(50,80) 9(100,-80) 10(100,80)
  rect 0x0 hole 38 unplated: M(-75,0) M(75,0)
  silkscreen extent -163,-136 -133,-106, body extent -125,-115 125,115, height 285
L0805_1.45MM_MD [mm] "Inductor - 0805 - Medium Density"
  rect 1.25x1.4 smd: 1(-0.875,0) 2(0.875,0)
  body extent -1,-0.62 1,0.63, height 1.45
L_MSS1038 [mm] "Coilcraft MSS1038 SMT Inductor"
  rect 1.78x3.56 smd: 1(-4.7,0) 2(4.7,0)
  silkscreen extent -5,-5 5.2,5, body extent -5.04,-5.1 5.26,5.1, height 3.91
LED-0805-GREEN [mm] "LED_0805"
  rect 0.85x1.3 smd: A(-0.875,0) C(0.875,0)
  silkscreen extent -0.38,-0.63 1.52,0.64, body extent -1,-0.62 1,0.62, height 0.75
LED-0805-RED [mm] "LED_0805"
  rect 0.85x1.3 smd: A(-0.875,0) C(0.875,0)
  silkscreen extent -0.38,-0.63 1.52,0.64, body extent -1,-0.62 1,0.62, height 0.75
M2.5 [mm]
  round 0 hole 0.5: 1(-2.087,0) 1(-1.476,-1.476) 1(-1.476,1.476) 1(0,-2.087) 1(0,2.087) 1(1.476,-1.476) 1(1.476,1.476) 1(2.087,0)
  round 5.25 hole 3.1: 1(0,0)
QFN50P300X300X80_HS-17N-2 [mm] "QFN, 16-Leads, Body 3.00x3.00mm, Pitch 0.50mm, Thermal Pad 1.23x1.23mm, IPC Medium Density"
  rect 0.8x0.3 smd mask+0.05: 1(-1.475,0.75) 2(-1.475,0.25) 3(-1.475,-0.25) 4(-1.475,-0.75) 9(1.475,-0.75) 10(1.475,-0.25) 11(1.475,0.25) 12(1.475,0.75)
  rect 0.3x0.8 smd mask+0.05: 5(-0.75,-1.475) 6(-0.25,-1.475) 7(0.25,-1.475) 8(0.75,-1.475) 13(0.75,1.475) 14(0.25,1.475) 15(-0.25,1.475) 16(-0.75,1.475)
  rect 1.23x1.23 smd: 17(0,0)
  silkscreen extent -2.47,-1.7 1.7,1.7, body extent -1.56,-1.56 1.56,1.56, height 0.8
R0603_0.55MM_HD [mm] "Resistor 0603 High Density"
  rect 0.5x0.75 smd: 1(-0.725,0) 2(0.725,0)
  silkscreen extent -0.1,-0.28 0.1,0.28, body extent -0.8,-0.4 0.8,0.4, height 0.55
R0603_0.55MM_MD [mm] "Resistor 0603 Medium Density"
  rect 0.7x0.85 smd: 1(-0.825,0) 2(0.825,0)
  silkscreen extent -0.1,-0.33 0.1,0.33, body extent -0.8,-0.4 0.8,0.4, height 0.55
R0805_0.70MM_HD [mm] "Resistor 0805 High Density"
  rect 0.6x1.2 smd: 1(-0.875,0) 2(0.875,0)
  silkscreen extent -0.2,-0.5 0.2,0.5, body extent -1,-0.63 1,0.63, height 0.7
SMT_TP-1MM [mil] "1MM SMT Test pad"
  round 75 smd paste-10: 1(0,0)
SMT_TP-1MM-OCTAGON [mil] "SMT_TP-1MM-OCTAGON"
  oct 75x75 smd paste-10: 1(0,0)
SMT_TP-1MM-RECT [mil] "1MM SMT Test pad RECT"
  rect 75x75 smd paste-10: 1(0,0)
SMT_TP-1MM-ROUNDED-RECT [mil] "SMT_TP-1MM-ROUNDED-RECT"
  rrect50% 75x75 smd paste-10: 1(0,0)
SMT_TP-CHAMFERED-RECT [mil] "SMT Test pad CHAMFERED-RECT"
  round 1 smd paste-10: 1(0,0)
  Top Layer region: 37.5,-43.75 18.75,-62.5 -18.75,-62.5 -37.5,-43.75 -37.5,43.75 -18.75,62.5 18.75,62.5 37.5,43.75
SMT_TP_OBROUND [mil] "SMT_TP_OBROUND"
  oval 150x75 smd rot 135 paste-10: 1(0,0)
SO8-EP [mm] "SOIC, 8-Leads, Body 4.80x3.80mm, Pitch 1.27mm, Thermal Pad 3.60x2.70mm, IPC Medium Density"
  rect 1.45x0.6 smd mask+0.05: 1(-2.675,1.905) 2(-2.675,0.635) 3(-2.675,-0.635) 4(-2.675,-1.905) 5(2.675,-1.905) 6(2.675,-0.635) 7(2.675,0.635) 8(2.675,1.905)
  rect 2.7x3.6 smd mask+0.05: 9(0,0)
  silkscreen extent -2.8,-2.45 1.55,2.88, body extent -3,-2.45 3,2.45, height 1.55
SOIC127P600X175-8N [mm] "SOIC, 8-Leads, Body 4.90x3.90mm, Pitch 1.27mm, IPC Medium Density"
  rect 1.45x0.6 smd mask+0.05: 1(-2.725,1.905) 2(-2.725,0.635) 3(-2.725,-0.635) 4(-2.725,-1.905) 5(2.725,-1.905) 6(2.725,-0.635) 7(2.725,0.635) 8(2.725,1.905)
  silkscreen extent -2.85,-2.5 1.6,2.88, body extent -3,-2.5 3,2.5, height 1.75
"SOIC 8" [mm]
  rect 0.6x2.05 smd: 1(-1.905,-2.675) 2(-0.635,-2.675) 3(0.635,-2.675) 4(1.905,-2.675) 5(1.905,2.675) 6(0.635,2.675) 7(-0.635,2.675) 8(-1.905,2.675)
  silkscreen extent -2.88,-2.8 2.5,1.25, body extent -2.49,-3.19 2.51,3.14, height 1.88
SON127P600X80_HS-9N [mm] "SON, 8-Leads, Body 5.00x6.00mm, Pitch 1.27mm, Thermal Pad 4.00x3.40mm, IPC Medium Density"
  rect 1.15x0.45 smd: 1(-2.77,1.905) 2(-2.77,0.635) 3(-2.77,-0.635) 4(-2.77,-1.905) 5(2.77,-1.905) 6(2.77,-0.635) 7(2.77,0.635) 8(2.77,1.905)
  rect 3.4x4 smd paste-1.7: 9(0,0)
  silkscreen extent -3.97,-2.6 3.1,2.68, body extent -3.05,-2.55 3.05,2.55, height 0.8
SOT23-5 [mm] "SOT23, 5-Leads, Body 3.1x2.6mm (max), Pitch 0.95mm, IPC High Density"
  rect 0.85x0.6 smd: 1(-1.125,0.95) 2(-1.125,0) 3(-1.125,-0.95) 4(1.125,-0.95) 5(1.125,0.95)
  silkscreen extent -1.15,-1.5 0.5,1.92, body extent -1.38,-1.45 1.32,1.45, height 1.15
sot23-5 [mm] "SOT23, 5-Leads, Body 3.1x2.6mm (max), Pitch 0.95mm, IPC High Density"
  rect 0.85x0.6 smd: 1(-1.125,0.95) 2(-1.125,0) 3(-1.125,-0.95) 4(1.125,-0.95) 5(1.125,0.95)
  silkscreen extent -1.15,-1.5 0.5,1.93, body extent -1.38,-1.45 1.32,1.45, height 1.15
SOT143B [mm] "SOT143B"
  rect 1.1x0.8 smd: 1(0,0)
  rect 0.6x0.7 smd: 2(1.702,0) 3(1.702,1.9) 4(-0.2,1.9)
  silkscreen extent -0.71,0.43 2.21,1.52, body extent -0.7,-0.27 2.22,2.15, height 1
SOT223 [mm] "SOT223, 4-Leads, Body 6.7x7.3mm (max), Pitch 2.30mm, IPC High Density"
  rect 2.1x0.9 smd: 1(-2.85,2.3) 2(-2.85,0) 3(-2.85,-2.3)
  rect 2.1x3.3 smd: 4(2.85,0)
  silkscreen extent -2.98,-3.35 1.4,3.42, body extent -3.54,-3.35 3.76,3.35, height 1.75
SOT-23 [mm] "SOT-23"
  rect 1.2x0.6 smd: 1(-0.9,0.95) 2(-0.9,-0.95) 3(0.9,0)
  silkscreen extent -1.02,-1.55 0.87,1.93, body extent -1.27,-1.5 1.23,1.5, height 1.07
TC2030 [mil] "TC2030-MCP"
  round 31 smd paste-40: 1(110,135) 2(110,185) 3(160,135) 4(160,185) 5(210,135) 6(210,185)
  round 34 hole 35 unplated: A(60,160) B(260,200) C(260,120)
  round 92 hole 93 unplated: D(60,60) E(185,60) F(60,260) G(185,260)
  silkscreen extent 5,5 285,315
USB4145-03-0230-C [mm]
  rect 0.3x1.15 smd: A1(-2.75,1.485) A4(-1.25,1.485) A5(-0.75,1.485) A6(-0.25,1.485) A7(0.25,1.485) A8(0.75,1.485) A9(1.25,1.485) A12(2.75,1.485) B1(2.75,-1.485) B4(1.25,-1.485) B5(0.75,-1.485) B6(0.25,-1.485) B7(-0.25,-1.485) B8(-0.75,-1.485) B9(-1.25,-1.485) B12(-2.75,-1.485)
  oval 1.6x1.1 hole 0.6 slot 1.1 at 0 deg: S1(-4,1.43) S2(4,1.43) S3(-4,-1.43) S4(4,-1.43)
  round 0.71 hole 0.71 unplated: ""(-4,0) ""(4,0)
  silkscreen extent -2.85,-1.58 2.28,2.76, body extent -4.48,-1.86 4.47,1.83, height 7.46
WIREPAD-18AWG-4X-3.5MM [mm]
  rect 3.5x1.905 hole 1.397: 1(2,5.25) 2(2,1.75) 3(2,-1.75) 4(2,-5.25)
  rect 0x0 hole 2.5 unplated: M2(-2,-5.25) M2(-2,-1.75) M2(-2,1.75) M2(-2,5.25)
WIREPAD-22AWG-2X-3.5MM [mm]
  rect 3.175x1.651 hole 0.889: 1(2,1.75) 2(2,-1.75)
  rect 0x0 hole 2.5 unplated: q(-2,1.75) q(-2,-1.75)
WIREPAD-22AWG-3X-3.5MM [mm]
  rect 3.175x1.651 hole 0.889: 1(2,3.5) 2(2,0) 3(2,-3.5)
  rect 0x0 hole 2.5 unplated: q(-2,-3.5) q(-2,0) q(-2,3.5)
WIREPAD-22AWG-4X-3.5MM [mm]
  rect 3.175x1.651 hole 0.889: 1(2,5.25) 2(2,1.75) 3(2,-1.75) 4(2,-5.25)
  rect 0x0 hole 2.5 unplated: M2(-2,5.25) M2(-2,-1.75) M2(-2,1.75) M2(-2,-5.25)
WIREPAD-22AWG-6X-3.5MM [mm]
  rect 3.175x1.651 hole 0.889: 1(2,8.75) 2(2,5.25) 3(2,1.75) 4(2,-1.75) 5(2,-5.25) 6(2,-8.75)
  rect 0x0 hole 2.5 unplated: M2(-2,8.75) M2(-2,5.25) M2(-2,1.75) M2(-2,-1.75) M2(-2,-5.25) M2(-2,-8.75)
XTAL_2016 [mm] "Crystal 2.0 x 1.6 mm"
  rect 0.95x0.85 smd: 1(-0.725,-0.575) 2(0.725,-0.575) 3(0.725,0.575) 4(-0.725,0.575)
  silkscreen extent -1.08,-0.88 1.08,0.88, body extent -1.05,-0.85 1.05,0.85, height 0.56
XTAL_3215 [mm] "XTAL SMD 3.2 x 1.5 mm"
  rect 1x1.8 smd: 1(-1.25,0) 2(1.25,0)
  silkscreen extent -0.6,-0.75 0.6,0.75, body extent -1.6,-0.75 1.6,0.75, height 0.81

## Part data
C1 C2 C3 C4 C17 C18: library part GCM155R71H104KE02D, "CAP CER 0.1UF 50V X7R 0402", JLCPCB Part #=C85858, Manufacturer="Murata Electronics", Operating Temperature="-55°C ~ 125°C", Package=0402, Ratings=AEC-Q200, Supplier Part Number 1=490-10672-1-ND, Temperature Coefficient=X7R, Tolerance=±10%, Voltage - Rated=50V, Category=Capacitors, ComponentLink1Description="Datasheet (Internal)", ComponentLink1URL=https://search.murata.co.jp/Ceramy/image/img/A01X/G101/ENG/GCM155R71H104KE02-01.pdf, ComponentLink2Description="Datasheet (External)", ComponentLink2URL=https://search.murata.co.jp/Ceramy/image/img/A01X/G101/ENG/GCM155R71H104KE02-01.pdf, Manufacturer Part Number=GCM155R71H104KE02D, Substitution Notes="0.1µF , 50V , ±10% , X7R , -55°C ~ 125°C , AEC-Q200 , 0402", Supplier 1=Digikey, Thickness (Max)=0.55MM
C5: library part GCJ188R91H104KA01D, "CAP CER 0.1UF 50V X8R 0603", JLCPCB Part #=C437421, Manufacturer="Murata Electronics", Operating Temperature="-55°C ~ 150°C", Package=0603, Ratings=AEC-Q200, Supplier Part Number 1=490-14412-1-ND, Temperature Coefficient=X8R, Tolerance=±10%, Voltage - Rated=50V, Category=Capacitors, ComponentLink1Description="Datasheet (Internal)", ComponentLink1URL=https://search.murata.co.jp/Ceramy/image/img/A01X/G101/ENG/GCJ188R91H104KA01-01.pdf, ComponentLink2Description="Datasheet (External)", ComponentLink2URL=https://search.murata.co.jp/Ceramy/image/img/A01X/G101/ENG/GCJ188R91H104KA01-01.pdf, id=2218, is_external=1, Manufacturer Part Number=GCJ188R91H104KA01D, Substitution Notes="0.1µF , 50V , ±10% , X8R , -55°C ~ 150°C , AEC-Q200 , 0603", Supplier 1=Digikey, Thickness (Max)=0.90MM
C6 C20: library part GCM21BR71C475KA73K, "CAP CER 4.7UF 16V X7R 0805", JLCPCB Part #=C2167533, Manufacturer="Murata Electronics", Operating Temperature="-55°C ~ 125°C", Package=0805, Ratings=AEC-Q200, Temperature Coefficient=X7R, Tolerance=±10%, Voltage - Rated=16V, Category=Capacitors, Manufacturer Part Number=GCM21BR71C475KA73K, Substitution Notes="4.7µF , 16V , ±10% , X7R , -55°C ~ 125°C , AEC-Q200 , 0805", Thickness (Max)=1.40MM
C7: library part EEE-FK1V101P, "CAP ALUM 100UF 35V 20% SMD", ESR (Equivalent Series Resistance)=-, Lifetime @ Temp#="2000 Hrs @ 105°C", Manufacturer="Panasonic Electronic Components", Operating Temperature="-55°C ~ 105°C", Package=F, Package / Case="Radial- Can - SMD", Ratings=AEC-Q200, Ripple Current=600mA, Sort Value=100000000, Sort Value Package=F_100000000, Temperature Coefficient="Temperature Coefficient", Tolerance=±20%, Value_Voltage="100µF  35V", Voltage Rating=35V, cad-reference=EEE-FK1V101P, Capacitance=100µF, Category=Capacitors, ComponentLink1Description="Internal Datasheet", ComponentLink1URL=http://industrial.panasonic.com/www-cgi/jvcr13pz.cgi?E+PZ+3+ABA0120+EEEFK1V101P+7+WW, ComponentLink2Description="External Datasheet", ComponentLink2URL=http://industrial.panasonic.com/www-cgi/jvcr13pz.cgi?E+PZ+3+ABA0120+EEEFK1V101P+7+WW, Diameter=8.0, Features="General Purpose", Height=10.2, Height - Seated (Max)="0.402\" (10.20mm)", Impedance="160 mOhm", kicad-footprint=C_ALU_F:C_ALU_F, kicad-symbol=Capacitor:C_2P_P, Lead Spacing=-, Manufacturer Part Number=EEE-FK1V101P, Mounting Type="Surface Mount", Packaging="Cut Tape (CT)", Size / Dimension="0.315\" Dia (8.00mm)", Surface Mount Land Size="0.327\" L x 0.327\" W (8.30mm x 8.30mm)"
C8: library part GCJ32EC71H106KA01L, "CAP CER 10UF 50V X7S 1210", JLCPCB Part #=C437431, Manufacturer="Murata Electronics", Operating Temperature="-55°C ~ 125°C", Package=1210, Ratings=AEC-Q200, Supplier Part Number 1=490-14418-1-ND, Temperature Coefficient=X7S, Tolerance=±10%, Voltage - Rated=50V, Category=Capacitors, ComponentLink1Description="Datasheet (Internal)", ComponentLink1URL=https://search.murata.co.jp/Ceramy/image/img/A01X/G101/ENG/GCJ32EC71H106KA01-01.pdf, ComponentLink2Description="Datasheet (External)", ComponentLink2URL=https://search.murata.co.jp/Ceramy/image/img/A01X/G101/ENG/GCJ32EC71H106KA01-01.pdf, id=2462, is_external=1, Manufacturer Part Number=GCJ32EC71H106KA01L, Substitution Notes="10µF , 50V , ±10% , X7S , -55°C ~ 125°C , AEC-Q200 , 1210", Supplier 1=Digikey, Thickness (Max)=2.80MM
C9 C10: library part GCM155R71C473KA37D, "CAP CER 0.047UF 16V X7R 0402", JLCPCB Part #=C126525, Manufacturer="Murata Electronics", Operating Temperature="-55°C ~ 125°C", Package=0402, Ratings=AEC-Q200, Supplier Part Number 1=490-6042-1-ND, Temperature Coefficient=X7R, Tolerance=±10%, Voltage - Rated=16V, Category=Capacitors, ComponentLink1Description="Datasheet (Internal)", ComponentLink1URL=https://psearch.en.murata.com/capacitor/product/GCM155R71C473KA37%23.pdf, ComponentLink2Description="Datasheet (External)", ComponentLink2URL=https://psearch.en.murata.com/capacitor/product/GCM155R71C473KA37%23.pdf, Manufacturer Part Number=GCM155R71C473KA37D, Substitution Notes="0.047µF , 16V , ±10% , X7R , -55°C ~ 125°C , AEC-Q200 , 0402", Supplier 1=Digikey, Thickness (Max)=0.55MM
C11: library part GCM188R71C105KA64J, "CAP CER 1UF 16V X7R 0603", JLCPCB Part #=C2169902, Manufacturer="Murata Electronics", Operating Temperature="-55°C ~ 125°C", Package=0603, Ratings=AEC-Q200, Temperature Coefficient=X7R, Tolerance=±10%, Voltage - Rated=16V, Category=Capacitors, Manufacturer Part Number=GCM188R71C105KA64J, Substitution Notes="1µF , 16V , ±10% , X7R , -55°C ~ 125°C , AEC-Q200 , 0603", Thickness (Max)=0.90MM
C12 C13 C14: library part EEE-FK1A151P, "CAP ALUM 150UF 10V 20% SMD", ESR (Equivalent Series Resistance)=-, JLCPCB Part #=C264054, Lifetime @ Temp.="2000 Hrs @ 105°C", Manufacturer="Panasonic Electronic Components", Operating Temperature="-55°C ~ 105°C", Package=D, Package / Case="Radial- Can - SMD", Ratings=AEC-Q200, Ripple Current=240mA, Sort Value=150000000, Sort Value Package=D_150000000, Temperature Coefficient="Temperature Coefficient", Tolerance=±20%, Value_Voltage="150µF  10V", Voltage Rating=10V, Capacitance=150µF, Category=Capacitors, ComponentLink1Description="Internal Datasheet", ComponentLink1URL=http://industrial.panasonic.com/www-cgi/jvcr13pz.cgi?E+PZ+4+ABA0120+EEEFK1A151P+8+WW, ComponentLink2Description="External Datasheet", ComponentLink2URL=http://industrial.panasonic.com/www-cgi/jvcr13pz.cgi?E+PZ+4+ABA0120+EEEFK1A151P+8+WW, Diameter=6.30, Features="General Purpose", Height=5.80, Height - Seated (Max)="0.228\" (5.80mm)", id=1585, Impedance="360 mOhm", is_external=1, Lead Spacing=-, Manufacturer Part Number=EEE-FK1A151P, Mounting Type="Surface Mount", Packaging="Cut Tape (CT)", Size / Dimension="0.248\" Dia (6.30mm)", Surface Mount Land Size="0.260\" L x 0.260\" W (6.60mm x 6.60mm)"
C15: library part GCM188R72A103KA37J, "CAP CER 10000PF 100V X7R 0603", JLCPCB Part #=C2167085, Manufacturer="Murata Electronics", Operating Temperature="-55°C ~ 125°C", Package=0603, Ratings=AEC-Q200, Temperature Coefficient=X7R, Tolerance=±10%, Voltage - Rated=100V, Category=Capacitors, id=2095, is_external=1, Manufacturer Part Number=GCM188R72A103KA37J, Substitution Notes="10000pF , 100V , ±10% , X7R , -55°C ~ 125°C , AEC-Q200 , 0603", Thickness (Max)=0.90MM
C16: library part GCM1555C1H102FA16D, "CAP CER 1000PF 50V C0G/NP0 0402", Manufacturer="Murata Electronics", Operating Temperature="-55°C ~ 125°C", Package=0402, Ratings=AEC-Q200, Supplier Part Number 1=490-16461-1-ND, Temperature Coefficient="C0G, NP0", Tolerance=±1%, Voltage - Rated=50V, Category=Capacitors, ComponentLink1Description="Datasheet (Internal)", ComponentLink1URL=https://search.murata.co.jp/Ceramy/image/img/A01X/G101/ENG/GCM1555C1H102FA16-01.pdf, ComponentLink2Description="Datasheet (External)", ComponentLink2URL=https://search.murata.co.jp/Ceramy/image/img/A01X/G101/ENG/GCM1555C1H102FA16-01.pdf, Manufacturer Part Number=GCM1555C1H102FA16D, Substitution Notes="1000pF , 50V , ±1% , C0G, NP0 , -55°C ~ 125°C , AEC-Q200 , 0402", Supplier 1=Digikey, Thickness (Max)=0.55MM
C19: library part GCM1555C1H101FA16D, "CAP CER 100PF 50V C0G/NP0 0402", JLCPCB Part #=C2941926, Manufacturer="Murata Electronics", Operating Temperature="-55°C ~ 125°C", Package=0402, Ratings=AEC-Q200, Supplier Part Number 1=490-14349-1-ND, Temperature Coefficient="C0G, NP0", Tolerance=±1%, Voltage - Rated=50V, Category=Capacitors, ComponentLink1Description="Datasheet (Internal)", ComponentLink1URL=https://search.murata.co.jp/Ceramy/image/img/A01X/G101/ENG/GCM1555C1H101FA16-01.pdf, ComponentLink2Description="Datasheet (External)", ComponentLink2URL=https://search.murata.co.jp/Ceramy/image/img/A01X/G101/ENG/GCM1555C1H101FA16-01.pdf, Manufacturer Part Number=GCM1555C1H101FA16D, Substitution Notes="100pF , 50V , ±1% , C0G, NP0 , -55°C ~ 125°C , AEC-Q200 , 0402", Supplier 1=Digikey, Thickness (Max)=0.55MM
C21 C22 C23 C24: library part GCM1555C1H8R0DA16D, "CAP CER 8PF 50V C0G/NP0 0402", JLCPCB Part #=C126517, Manufacturer="Murata Electronics", Operating Temperature="-55°C ~ 125°C", Package=0402, Ratings=AEC-Q200, Supplier Part Number 1=490-13294-1-ND, Temperature Coefficient="C0G, NP0", Tolerance=±0.5pF, Voltage - Rated=50V, Category=Capacitors, ComponentLink1Description="Datasheet (Internal)", ComponentLink1URL=https://www.murata.com/~/media/webrenewal/support/library/catalog/products/capacitor/mlcc/c03e.ashx?la=en-us, ComponentLink2Description="Datasheet (External)", ComponentLink2URL=https://www.murata.com/~/media/webrenewal/support/library/catalog/products/capacitor/mlcc/c03e.ashx?la=en-us, Manufacturer Part Number=GCM1555C1H8R0DA16D, Substitution Notes="8pF , 50V , ±0.5pF , C0G, NP0 , -55°C ~ 125°C , AEC-Q200 , 0402", Supplier 1=Digikey, Thickness (Max)=0.55MM
C25 C26 C28: library part GCJ188R91H104KA01D, "CAP CER 0.1UF 50V X8R 0603", JLCPCB Part #=C437421, Manufacturer="Murata Electronics", Operating Temperature="-55°C ~ 150°C", Package=0603, Ratings=AEC-Q200, Temperature Coefficient=X8R, Tolerance=±10%, Voltage - Rated=50V, Category=Capacitors, id=2218, is_external=1, Manufacturer Part Number=GCJ188R91H104KA01D, Substitution Notes="0.1µF , 50V , ±10% , X8R , -55°C ~ 150°C , AEC-Q200 , 0603", Thickness (Max)=0.90MM
C27: library part GCM21BR71A106KE22K, "CAP CER 10UF 10V X7R 0805", JLCPCB Part #=C2167756, Manufacturer="Murata Electronics", Operating Temperature="-55°C ~ 125°C", Package=0805, Ratings=AEC-Q200, Supplier Part Number 1=490-14531-1-ND, Temperature Coefficient=X7R, Tolerance=±10%, Voltage - Rated=10V, Category=Capacitors, ComponentLink1Description="Datasheet (Internal)", ComponentLink1URL=https://search.murata.co.jp/Ceramy/image/img/A01X/G101/ENG/GCM21BR71A106KE22-01.pdf, ComponentLink2Description="Datasheet (External)", ComponentLink2URL=https://search.murata.co.jp/Ceramy/image/img/A01X/G101/ENG/GCM21BR71A106KE22-01.pdf, id=2281, is_external=1, Manufacturer Part Number=GCM21BR71A106KE22K, Substitution Notes="10µF , 10V , ±10% , X7R , -55°C ~ 125°C , AEC-Q200 , 0805", Supplier 1=Digikey, Thickness (Max)=1.40MM
D1: "DIODE ZENER 12V 300MW SOT23-3", Current - Reverse Leakage @ Vr="100nA @ 8V", JLCPCB Part #=C85186, Manufacturer="Diodes Inc", Operating Temperature="-65°C ~ 150°C", Package="TO-236-3- SC-59- SOT-23-3", Power - Max=300mW, Supplier Device Package=SOT-23-3, Supplier Part Number 1=BZX84C12-FDICT-ND, Tolerance=±5%, Voltage - Forward (Vf) (Max) @ If="900mV @ 10mA", Voltage - Zener (Nom) (Vz)=12V, cad-reference=BZX84C12-7-F, Category=Diodes, CategorySort=400, ComponentLink1Description="Internal Datasheet", ComponentLink1URL=http://www.diodes.com/datasheets/ds18001.pdf, ComponentLink2Description="External Datasheet", ComponentLink2URL=http://www.diodes.com/datasheets/ds18001.pdf, Diode Suffix=1A_3C, Impedance (Max) (Zzt)="25 Ohm", kicad-footprint=D_SOT-23-3:D_SOT-23-3_P, kicad-symbol=Diode:DZ_1A_3C, Manufacturer Part Number=BZX84C12-7-F, Mounting Type="Surface Mount", Num Pins=3, Packaging="Cut Tape (CT)", SortValue=BZX84C12-7-F, Supplier 1=Digi-Key
D2 D9 D11: "DIODE ZENER 16V 300MW SOT23", Current - Reverse Leakage @ Vr="100nA @ 11.2V", JLCPCB Part #=C968217, Manufacturer="Diodes Inc", Operating Temperature="-65°C ~ 150°C", Package="TO-236-3- SC-59- SOT-23-3", Power - Max=300mW, Supplier Device Package=SOT-23-3, Supplier Part Number 1=BZX84B16-FDICT-ND, Tolerance=±2%, Voltage - Forward (Vf) (Max) @ If="900mV @ 10mA", Voltage - Zener (Nom) (Vz)=16V, cad-reference=BZX84B16-7-F, Category=Diodes, CategorySort=400, ComponentLink1Description="Internal Datasheet", ComponentLink1URL=http://www.diodes.com/datasheets/BZX84Bxx(x).pdf, ComponentLink2Description="External Datasheet", ComponentLink2URL=http://www.diodes.com/datasheets/BZX84Bxx(x).pdf, Diode Suffix=1A_3C, Impedance (Max) (Zzt)="40 Ohm", kicad-footprint=D_SOT-23-3:D_SOT-23-3_P, kicad-symbol=Diode:DZ_1A_3C, Manufacturer Part Number=BZX84B16-7-F, Mounting Type="Surface Mount", Num Pins=3, Packaging="Cut Tape (CT)", SortValue=BZX84B16-7-F, Supplier 1=Digi-Key
D3 D6 D7: "DIODE SWITCHING 75V 200MA SOT23", Capacitance @ Vr- F="2pF @ 0V- 1MHz", Current - Average Rectified (Io)=200mA, Current - Reverse Leakage @ Vr="1µA @ 75V", JLCPCB Part #=C69162, Manufacturer="Diodes Inc", Package="TO-236-3- SC-59- SOT-23-3", Supplier Device Package=SOT-23-3, Supplier Part Number 1=BAS16-FDICT-ND, Voltage - DC Reverse (Vr) (Max)=75V, Voltage - Forward (Vf) (Max) @ If="1.25V @ 150mA", Category=Diodes, CategorySort=400, ComponentLink1Description="Internal Datasheet", ComponentLink1URL=http://www.diodes.com/datasheets/ds12003.pdf, ComponentLink2Description="External Datasheet", ComponentLink2URL=http://www.diodes.com/datasheets/ds12003.pdf, Diode Suffix=1A_3C, Diode Type=Standard, id=3104, is_external=1, Manufacturer Part Number=BAS16-7-F, Mounting Type="Surface Mount", Num Pins=3, Packaging="Cut Tape (CT)", Reverse Recovery Time (trr)=4ns, SortValue=BAS16-7-F, Speed="Small Signal =< 200mA (Io)- Any Speed", Supplier 1=Digi-Key
D4: "TVS DIODE 24VWM 42VC SOD323", JLCPCB Part #=C503381, Manufacturer=Nexperia, id=3715, is_external=1, Manufacturer Part Number=PESD1IVN24-AX
D5 D8 D12 D13 D14: "TVS DIODE 5VWM 14VC SOD323", JLCPCB Part #=C19224, Manufacturer=Nexperia, id=3718, is_external=1, Manufacturer Part Number=PESD5V0S1BA-115
D15: "0805 Red 630nm LED Indication - Discrete 1.95V 0805 (2012 Metric)", Manufacturer=Kingbright, cad-reference=APT2012SURCK, kicad-footprint=LED-0805-RED:LED-0805-RED, kicad-symbol=LED-RED:LED-RED, Manufacturer Part Number=APT2012SURCK
D16: "0805 Green 570nm LED Indication - Discrete 2.1V 0805 (2012 Metric)", Manufacturer=Kingbright, cad-reference=APT2012CGCK, kicad-footprint=LED-0805-GREEN:LED-0805-GREEN, kicad-symbol=LED-GREEN:LED-GREEN, Manufacturer Part Number=APT2012CGCK
J1 J2: Internal Part Number=nan, Manufacturer=Wavenumber, cad-reference=WIREPAD-18AWG-4X-3.5MM, Flags=NO_BOM, Manufacturer Part Number=WIREPAD-18AWG-4X-3.5MM
J3 J4 J5 J6: Manufacturer=Wavenumber, Flags=NO_BOM
  J3: cad-reference=WIREPAD-22AWG-6X-3.5MM, Manufacturer Part Number=WIREPAD-22AWG-6X-3.5MM
  J4: cad-reference=WIREPAD-22AWG-4X-3.5MM, Manufacturer Part Number=WIREPAD-22AWG-4X-3.5MM
  J5: cad-reference=WIREPAD-22AWG-3X-3.5MM, Manufacturer Part Number=WIREPAD-22AWG-3X-3.5MM
  J6: cad-reference=WIREPAD-22AWG-2X-3.5MM, Manufacturer Part Number=WIREPAD-22AWG-2X-3.5MM
J7: "Tag Connect Pads for ARM SWD Debugging", Manufacturer=Wavenumber, cad-reference=TAG-CONNECT-SWD, Flags=NO_BOM, Manufacturer Part Number=TAG-CONNECT-SWD
J8: "USB 2.0 TYPE-C RECPT VERT SMT", JLCPCB Part #=C5291559, Manufacturer=GCT, cad-reference=USB4145-03-0230-C, kicad-footprint=USB4145-03-0230-C:USB4145-03-0230-C, kicad-symbol=USB4145-03-0230-C:USB4145-03-0230-C, Manufacturer Part Number=USB4145-03-0230-C
J9: "Connector Header Surface Mount 10 position 0.050\" (1.27mm)", JLCPCB Part #=C598540, Manufacturer="Amphenol ICC", id=2782, is_external=1, Manufacturer Part Number=20021121-00010T4LF
L1 L3: library part MLZ1608M100WTD25, "10uH ±20% 90mA 1.05Ω 0603 Inductors (SMD)", JLCPCB Part #=C2047264, Manufacturer=TDK, cad-reference=MLZ1608M100WTD25, Category=Inductors, CategorySort=300, kicad-footprint=C0603_0.90MM_MD:C0603_0.90MM_MD, kicad-symbol=Inductor:Inductor, Manufacturer Part Number=MLZ1608M100WTD25
L2: library part LQG15HS15NJ02D, "450mA 15nH ±5% 320mΩ 0402 Inductors (SMD) ROHS", JLCPCB Part #=C86059, Manufacturer=Murata, cad-reference=LQG15HS15NJ02D, Category=Inductors, CategorySort=300, kicad-footprint=C0402_0.55MM_MD:C0402_0.55MM_MD, kicad-symbol=Inductor:Inductor, Manufacturer Part Number=LQG15HS15NJ02D
L4: library part CDRH103RNP-6R8NC-B, "3.6A 6.8uH ±30% 3.84A SMD,10.2x10mm Power Inductors ROHS", Inductance (uH)=6.8, JLCPCB Part #=C167253, Manufacturer=Sumida, Sort Value Package=MSS1038_68, Tolerance=20%, Category=Inductors, CategorySort=300, DCR Max (Ohms)=35, Height (mm)=2.8, id=9209, is_external=1, Manufacturer Part Number=CDRH103RNP-6R8NC-B
L5 L6: "40mΩ  3A ±25% 220Ω@100MHz 0805 Ferrite Beads ROHS", JLCPCB Part #=C76818, Manufacturer="TDK Corporation", Max Current=3A, Tolerance=±25%, cad-reference=MPZ2012S221AT000, Category=Inductors, CategorySort=300, kicad-footprint=L_0805:L0805_1.45MM_MD, kicad-symbol=Inductor:L_2P, Manufacturer Part Number=MPZ2012S221AT000
M1 M2 M3 M4: "M2.5 screw hole ISO standard 3.1mm clearance 8 conductivity holes 5.25mm pad size", Manufacturer=Wavenumber, Category="Screw Mount", Flags=no-bom, id=4097, is_external=0, Manufacturer Part Number=M2.5
Q1 Q2 Q7: "MOSFET P-CH 50V 130MA SOT23-3", JLCPCB Part #=C85202, Manufacturer="Diodes Incorporated", id=9187, is_external=1, Manufacturer Part Number=BSS84-7-F
Q3 Q4 Q8 Q9 Q10: "MOSFET N-CH 60V 0.36A SOT-23", JLCPCB Part #=C81488, Manufacturer=Nexperia, id=9174, is_external=1, Manufacturer Part Number=2N7002P,215
Q5: "N-Channel MOSFET, Logic Level Enhancement Mode, 50V 0.22A, 1.6Ω", JLCPCB Part #=C255592, Manufacturer=OnSemi, id=9184, is_external=1, Manufacturer Part Number=BSS138K
Q6: "MOSFET P-CH 40V 6.4A SOT223", JLCPCB Part #=C141324, Manufacturer="Diodes Incorporated", cad-reference=ZXMP4A16GTA, kicad-footprint=SOT223:SOT223, kicad-symbol=MOSFET-P-CH-1G2D4D3S:MOSFET-P-CH-1G2D4D3S, Manufacturer Part Number=ZXMP4A16GTA
R1 R2 R8 R14 R19 R20 R21 R24 R26 R31 R38: library part ERJ-3EKF1003V, "RES 100K OHM 1/10W 1% 0603 SMD", JLCPCB Part #=C189597, Limiting Element Voltage=75, Manufacturer="Panasonic Electronic Components", Maximum Overload Voltage=150, Maximum Working Voltage=75.0V, Package="0603 (1608 Metric)", Package Power="0603  (0.1W)", Power (Watts)="0.1W- 1/10W", Ratings=AEC-Q200, Resistance (Ohms)=100k, Sort Value=100000, Sort Value Package=603_100000, Supplier Package=0603, Temperature Coefficient=±100ppm/°C, Tolerance=±1%, Category=Resistors, Composition="Thick Film", Features=-, Height=0.55MM, is_external=1, Manufacturer 1="Panasonic Electronic Components", Manufacturer Part Number=ERJ-3EKF1003V, Manufacturer Part Number 1=ERJ-3EKF1003V, Number of Terminations=2, Packaging="Cut Tape (CT)", Substitution Notes="100k , ±1% , 0603 , AEC-Q200"
  R1 R2 R14 R19 R20 R21 R24 R26 R31 R38: id=5044
  R8: id=5026, Size / Dimension="0.063\" L x 0.031\" W (1.60mm x 0.80mm)"
R3 R4 R11 R18 R25 R28: library part ERJ-3EKF1002V, "RES 10K OHM 1/10W 1% 0603 SMD", JLCPCB Part #=C191124, Limiting Element Voltage=75, Manufacturer="Panasonic Electronic Components", Maximum Overload Voltage=150, Maximum Working Voltage=31.6V, Package="0603 (1608 Metric)", Package Power="0603  (0.1W)", Power (Watts)="0.1W- 1/10W", Ratings=AEC-Q200, Resistance (Ohms)=10k, Sort Value=10000, Sort Value Package=603_10000, Supplier Package=0603, Temperature Coefficient=±100ppm/°C, Tolerance=±1%, Category=Resistors, Composition="Thick Film", Features=-, Height=0.55MM, id=5025, is_external=1, Manufacturer 1="Panasonic Electronic Components", Manufacturer Part Number=ERJ-3EKF1002V, Manufacturer Part Number 1=ERJ-3EKF1002V, Number of Terminations=2, Packaging="Cut Tape (CT)", Size / Dimension="0.063\" L x 0.031\" W (1.60mm x 0.80mm)", Substitution Notes="10k , ±1% , 0603 , AEC-Q200"
R5 R6 R10 R29: library part ERJ-3EKF1004V, "RES 1M OHM 1/10W 1% 0603 SMD", JLCPCB Part #=C105578, Limiting Element Voltage=75, Manufacturer="Panasonic Electronic Components", Maximum Overload Voltage=150, Maximum Working Voltage=75.0V, Package="0603 (1608 Metric)", Package Power="0603  (0.1W)", Power (Watts)="0.1W- 1/10W", Ratings=AEC-Q200, Resistance (Ohms)=1M, Sort Value=1000000, Sort Value Package=603_1000000, Supplier Package=0603, Temperature Coefficient=±100ppm/°C, Tolerance=±1%, Category=Resistors, Composition="Thick Film", Features=-, Height=0.55MM, id=5045, is_external=1, Manufacturer 1="Panasonic Electronic Components", Manufacturer Part Number=ERJ-3EKF1004V, Manufacturer Part Number 1=ERJ-3EKF1004V, Number of Terminations=2, Packaging="Cut Tape (CT)", Substitution Notes="1M , ±1% , 0603 , AEC-Q200"
R7: library part ERJ-3EKF1001V, "RES 1K OHM 1/10W 1% 0603 SMD", JLCPCB Part #=C118155, Limiting Element Voltage=75, Manufacturer="Panasonic Electronic Components", Maximum Overload Voltage=150, Maximum Working Voltage=10.0V, Package="0603 (1608 Metric)", Package Power="0603  (0.1W)", Power (Watts)="0.1W- 1/10W", Ratings=AEC-Q200, Resistance (Ohms)=1k, Sort Value=1000, Sort Value Package=603_1000, Supplier Package=0603, Temperature Coefficient=±100ppm/°C, Tolerance=±1%, Category=Resistors, Composition="Thick Film", Features=-, Height=0.55MM, id=5024, is_external=1, Manufacturer 1="Panasonic Electronic Components", Manufacturer Part Number=ERJ-3EKF1001V, Manufacturer Part Number 1=ERJ-3EKF1001V, Number of Terminations=2, Packaging="Cut Tape (CT)", Size / Dimension="0.063\" L x 0.031\" W (1.60mm x 0.80mm)", Substitution Notes="1k , ±1% , 0603 , AEC-Q200"
R9 R12 R27 R30 R32: library part ERJ-3EKF1000V, "RES 100 OHM 1/10W 1% 0603 SMD", JLCPCB Part #=C193336, Limiting Element Voltage=75, Manufacturer="Panasonic Electronic Components", Maximum Overload Voltage=150, Maximum Working Voltage=3.2V, Package="0603 (1608 Metric)", Package Power="0603  (0.1W)", Power (Watts)="0.1W- 1/10W", Ratings=AEC-Q200, Resistance (Ohms)=100, Sort Value Package=603_100, Supplier Package=0603, Supplier Part Number 1=P100HCT-ND, Temperature Coefficient=±100ppm/°C, Tolerance=±1%, Category=Resistors, ComponentLink1Description="Internal Datasheet", ComponentLink1URL="datasheets\Panasonic Electronic Components\AOA0000CE2.pdf", ComponentLink2Description="External Datasheet", ComponentLink2URL=http://industrial.panasonic.com/www-data/pdf/AOA0000/AOA0000CE2.pdf, Composition="Thick Film", Features=-, Height=0.55MM, id=5023, is_external=1, Manufacturer 1="Panasonic Electronic Components", Manufacturer Part Number=ERJ-3EKF1000V, Manufacturer Part Number 1=ERJ-3EKF1000V, Number of Terminations=2, Packaging="Cut Tape (CT)", Size / Dimension="0.063\" L x 0.031\" W (1.60mm x 0.80mm)", Sort Value=100, Substitution Notes="100 , ±1% , 0603 , AEC-Q200", Supplier 1=Digi-Key
R13 R15 R16: library part ERJ-6GEY0R00V, "RES 0.0 OHM 1/8W JUMP 0805 SMD", JLCPCB Part #=C96345, Limiting Element Voltage=150, Manufacturer="Panasonic Electronic Components", Maximum Overload Voltage=200, Maximum Working Voltage=0.0V, Package="0805 (2012 Metric)", Package Power="0805  (0.125W)", Power (Watts)="0.125W- 1/8W", Ratings=AEC-Q200, Resistance (Ohms)=0, Sort Value Package=805_0, Supplier Package=805, Supplier Part Number 1=P0.0ACT-ND, Temperature Coefficient=-, Tolerance=Jumper, cad-reference=ERJ-6GEY0R00V, Category=Resistors, Composition="Thick Film", Features=-, Height=0.70MM, kicad-footprint=R0805_0.70MM_HD:R0805_0.70MM_HD, kicad-symbol=Resistor:R_2P, Manufacturer 1="Panasonic Electronic Components", Manufacturer Part Number=ERJ-6GEY0R00V, Manufacturer Part Number 1=ERJ-6GEY0R00V, Number of Terminations=2, Sort Value=0, Substitution Notes="0 , Jumper , 0805 , AEC-Q200", Supplier 1=Digi-Key
R17: library part ERJ-3EKF5233V, "RES 523K OHM 1/10W 1% 0603 SMD", JLCPCB Part #=C185324, Limiting Element Voltage=75, Manufacturer="Panasonic Electronic Components", Maximum Overload Voltage=150, Maximum Working Voltage=75.0V, Package="0603 (1608 Metric)", Package Power="0603  (0.1W)", Power (Watts)="0.1W- 1/10W", Ratings=AEC-Q200, Resistance (Ohms)=523k, Sort Value=523000, Sort Value Package=603_523000, Supplier Package=0603, Temperature Coefficient=±100ppm/°C, Tolerance=±1%, Category=Resistors, Composition="Thick Film", Features=-, Height=0.55MM, id=5445, is_external=1, Manufacturer 1="Panasonic Electronic Components", Manufacturer Part Number=ERJ-3EKF5233V, Manufacturer Part Number 1=ERJ-3EKF5233V, Number of Terminations=2, Packaging="Cut Tape (CT)", Substitution Notes="523k , ±1% , 0603 , AEC-Q200"
R22: library part ERJ-3EKF4992V, "RES 49.9K OHM 1/10W 1% 0603 SMD", JLCPCB Part #=ERJ3EKF4992V, Limiting Element Voltage=75, Manufacturer="Panasonic Electronic Components", Maximum Overload Voltage=150, Maximum Working Voltage=70.6V, Package="0603 (1608 Metric)", Package Power="0603  (0.1W)", Power (Watts)="0.1W- 1/10W", Ratings=AEC-Q200, Resistance (Ohms)=49.9k, Sort Value=49900, Sort Value Package=603_49900, Supplier Package=0603, Temperature Coefficient=±100ppm/°C, Tolerance=±1%, Category=Resistors, Composition="Thick Film", Features=-, Height=0.55MM, id=5429, is_external=1, Manufacturer 1="Panasonic Electronic Components", Manufacturer Part Number=ERJ-3EKF4992V, Manufacturer Part Number 1=ERJ-3EKF4992V, Number of Terminations=2, Packaging="Cut Tape (CT)", Substitution Notes="49.9k , ±1% , 0603 , AEC-Q200"
R23: library part ERJ-3EKF1003V, "RES 100K OHM 1/10W 1% 0603 SMD", JLCPCB Part #=C189597, Limiting Element Voltage=75, Manufacturer="Panasonic Electronic Components", Maximum Overload Voltage=150, Maximum Working Voltage=75.0V, Package="0603 (1608 Metric)", Package Power="0603  (0.1W)", Power (Watts)="0.1W- 1/10W", Ratings=AEC-Q200, Sort Value=100000, Sort Value Package=603_100000, Supplier Package=0603, Supplier Part Number 1=P100KHCT-ND, Temperature Coefficient=±100ppm/°C, Tolerance=±1%, Category=Resistors, ComponentLink1Description="Internal Datasheet", ComponentLink1URL="datasheets\Panasonic Electronic Components\AOA0000CE2.pdf", ComponentLink2Description="External Datasheet", ComponentLink2URL=http://industrial.panasonic.com/www-data/pdf/AOA0000/AOA0000CE2.pdf, Composition="Thick Film", Features=-, Height=0.55MM, id=5026, is_external=1, Manufacturer 1="Panasonic Electronic Components", Manufacturer Part Number=ERJ-3EKF1003V, Manufacturer Part Number 1=ERJ-3EKF1003V, Number of Terminations=2, Packaging="Cut Tape (CT)", Resistance (Ohms)=100k, Size / Dimension="0.063\" L x 0.031\" W (1.60mm x 0.80mm)", Substitution Notes="100k , ±1% , 0603 , AEC-Q200", Supplier 1=Digi-Key
R33: library part ERJ-3EKF1003V, "RES 100K OHM 1/10W 1% 0603 SMD", JLCPCB Part #=C189597, Limiting Element Voltage=75, Manufacturer="Panasonic Electronic Components", Maximum Overload Voltage=150, Maximum Working Voltage=75.0V, Package="0603 (1608 Metric)", Package Power="0603  (0.1W)", Power (Watts)="0.1W- 1/10W", Ratings=AEC-Q200, Resistance (Ohms)=100k, Sort Value=100000, Sort Value Package=603_100000, Supplier Package=0603, Supplier Part Number 1=P100KHCT-ND, Temperature Coefficient=±100ppm/°C, Tolerance=±1%, Category=Resistors, ComponentLink1Description="Internal Datasheet", ComponentLink1URL="datasheets\Panasonic Electronic Components\AOA0000CE2.pdf", ComponentLink2Description="External Datasheet", ComponentLink2URL=http://industrial.panasonic.com/www-data/pdf/AOA0000/AOA0000CE2.pdf, Composition="Thick Film", Features=-, Height=0.55MM, id=5026, is_external=1, Manufacturer 1="Panasonic Electronic Components", Manufacturer Part Number=ERJ-3EKF1003V, Manufacturer Part Number 1=ERJ-3EKF1003V, Number of Terminations=2, Packaging="Cut Tape (CT)", Size / Dimension="0.063\" L x 0.031\" W (1.60mm x 0.80mm)", Substitution Notes="100k , ±1% , 0603 , AEC-Q200", Supplier 1=Digi-Key